# Altium PCB miaow-foc-board.pcbdoc (part 1 of 10)
Units mil, origin at the board's own origin, x right, y up, seen from the top; angles counter-clockwise.
Board outline 2755.91 x 3149.61 mil, 6 copper layers (SIG1, GND2, SIG3, PWR4, GND5, SIG6), stack 60.566 mil thick; 437 components, 392 nets, 2120 pads, 1697 vias.
Unrouted connection lines stored in the file: 1090.
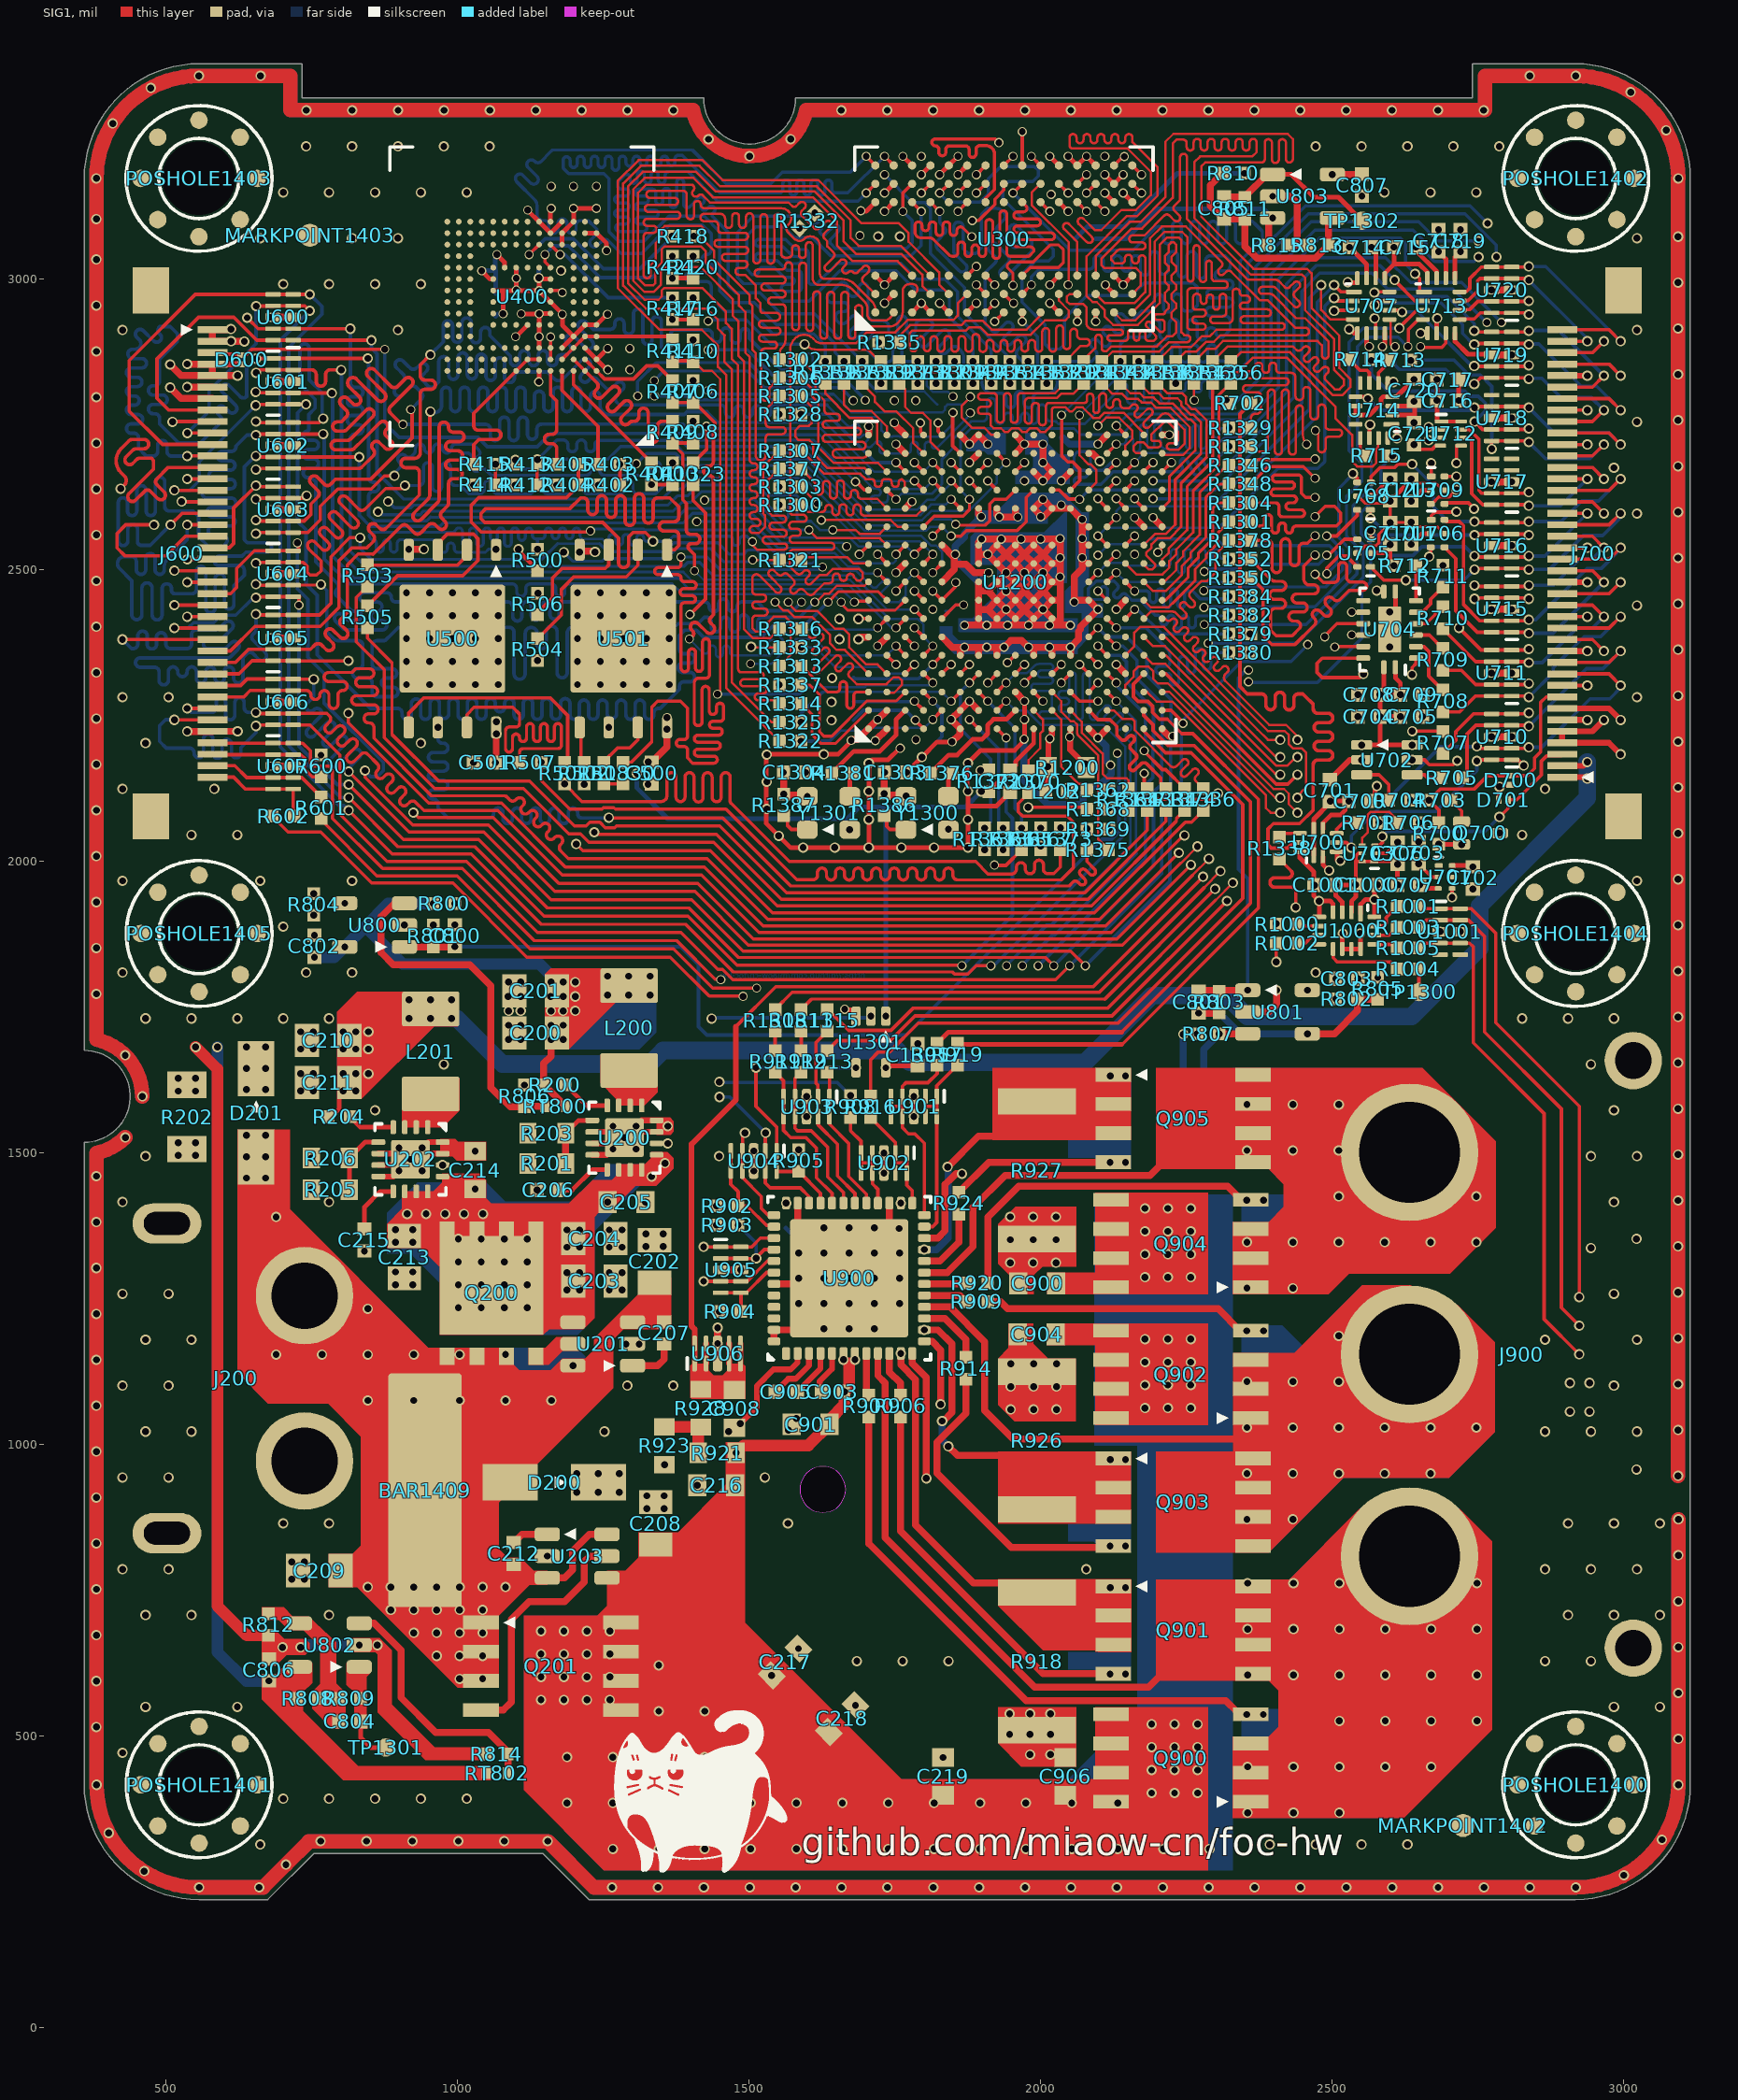
[diagram p0: SIG1 view]
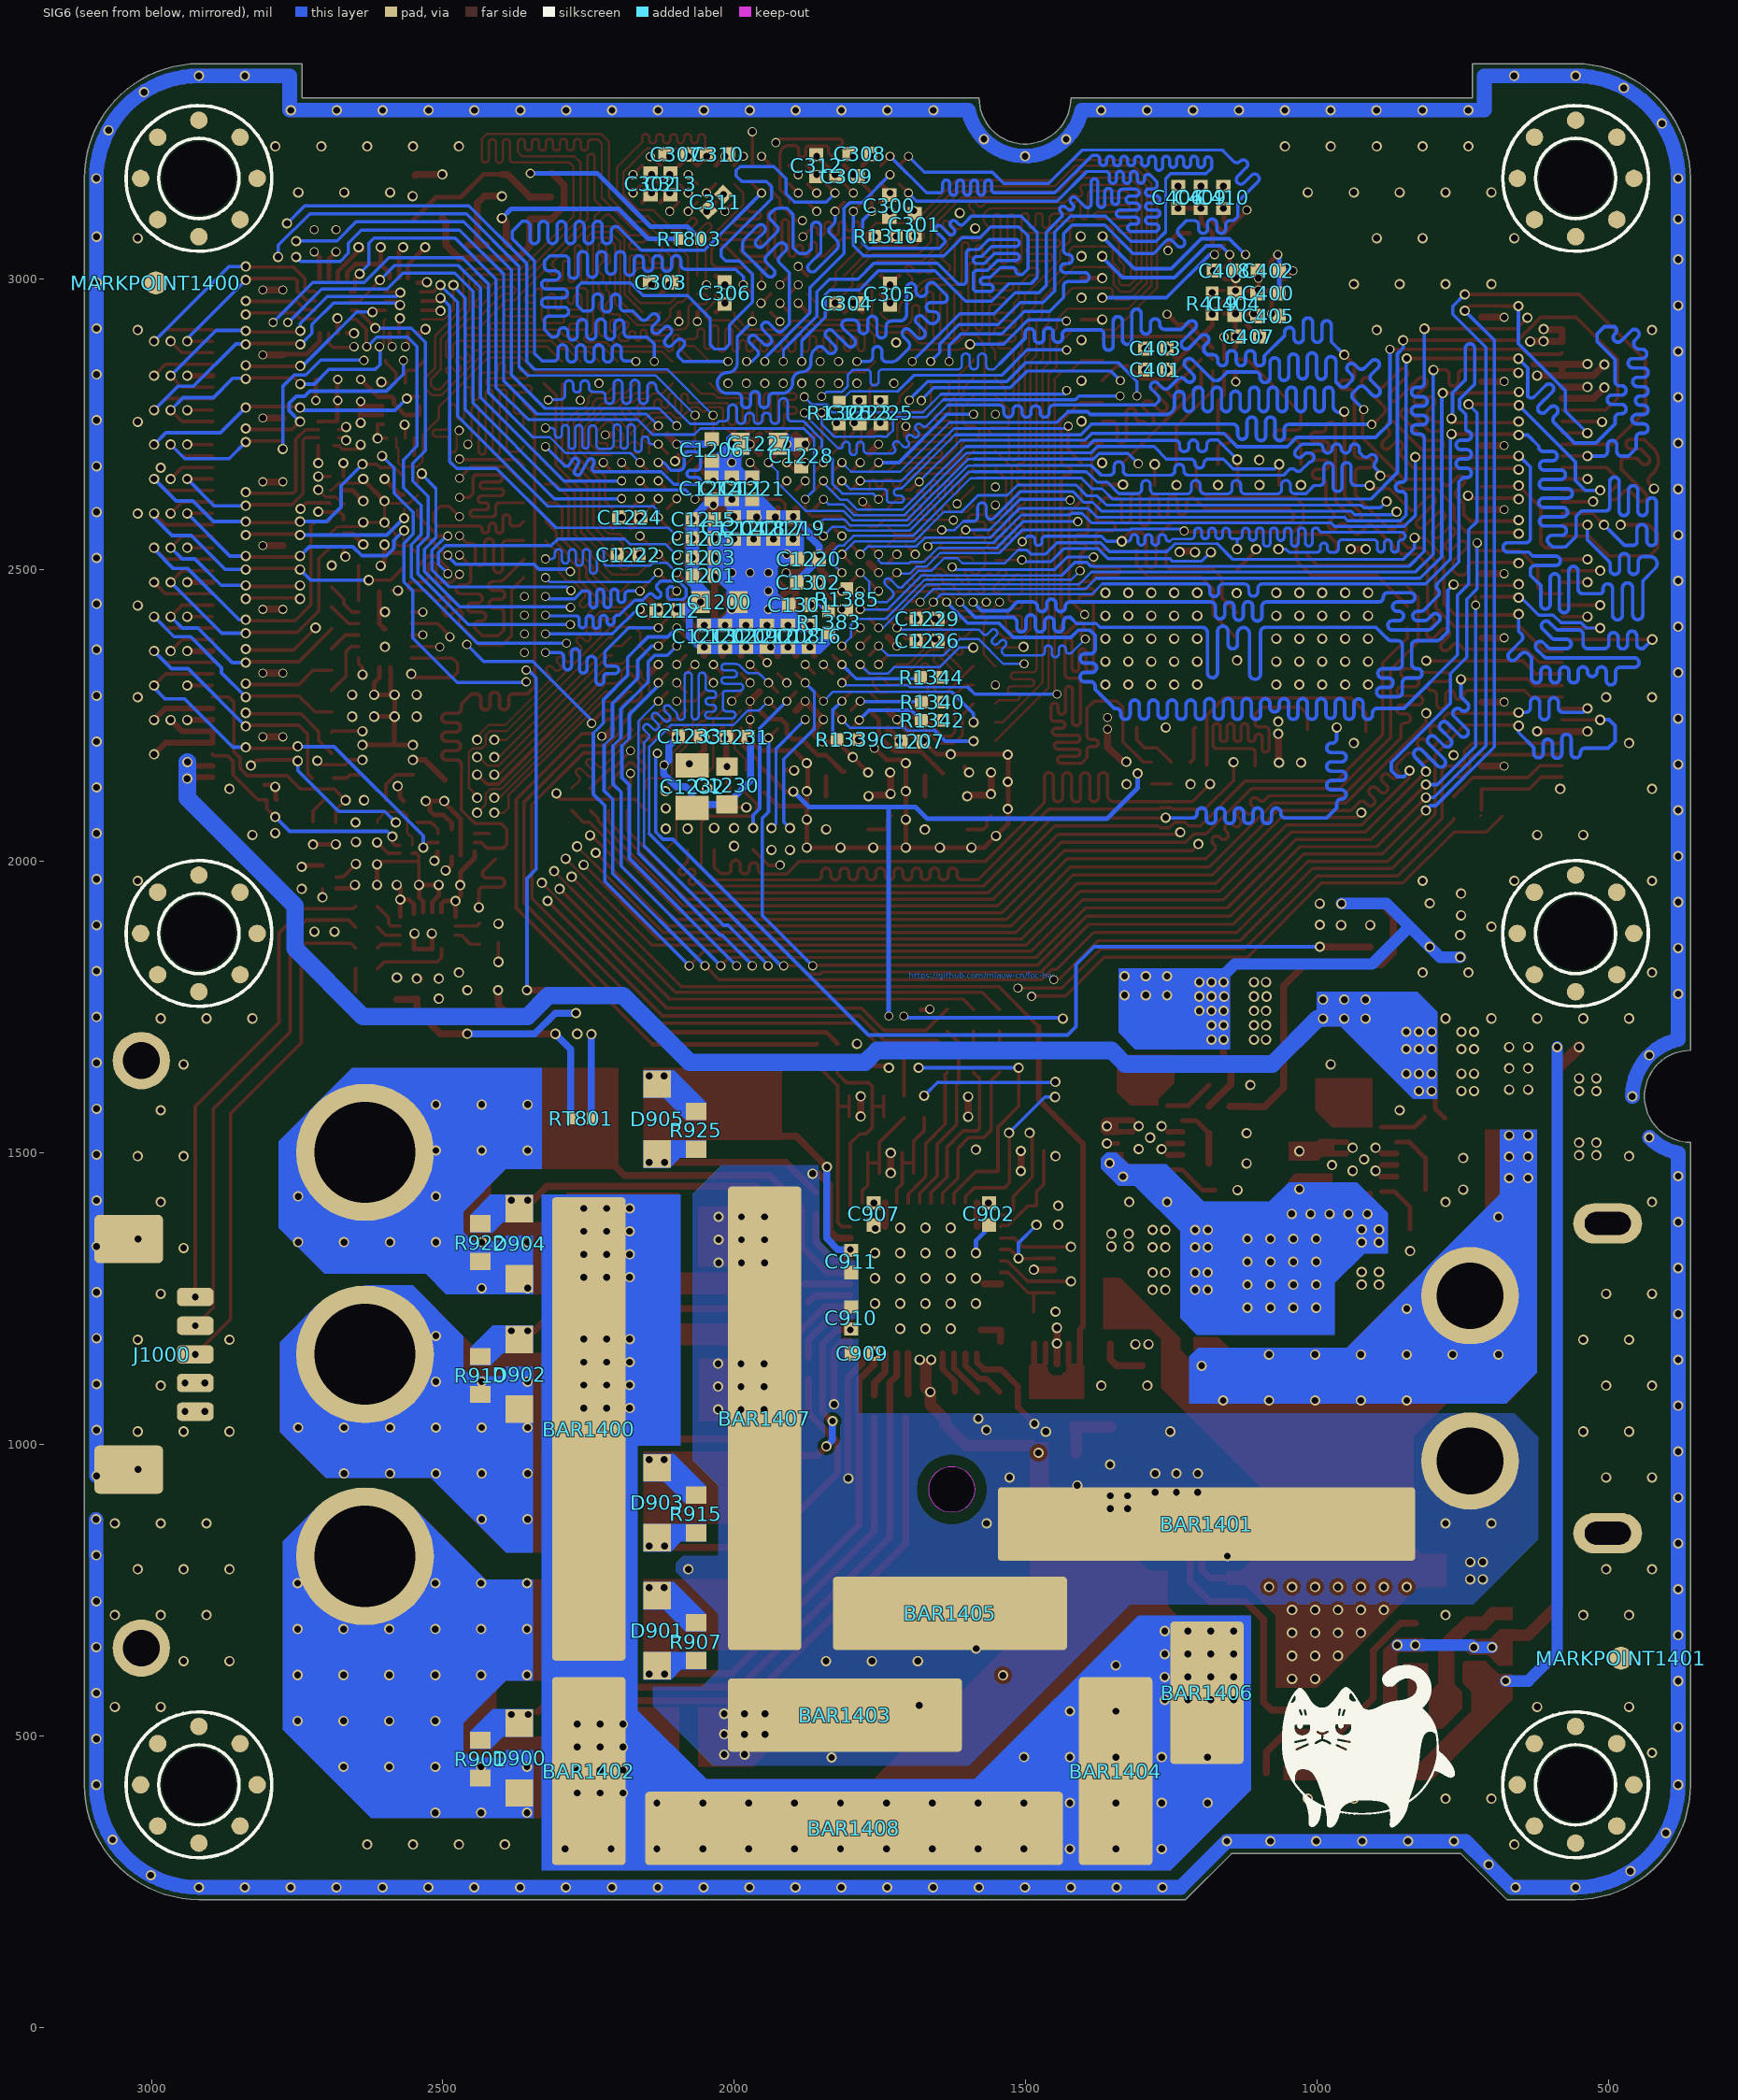
[diagram p1: SIG6 view, seen from below]
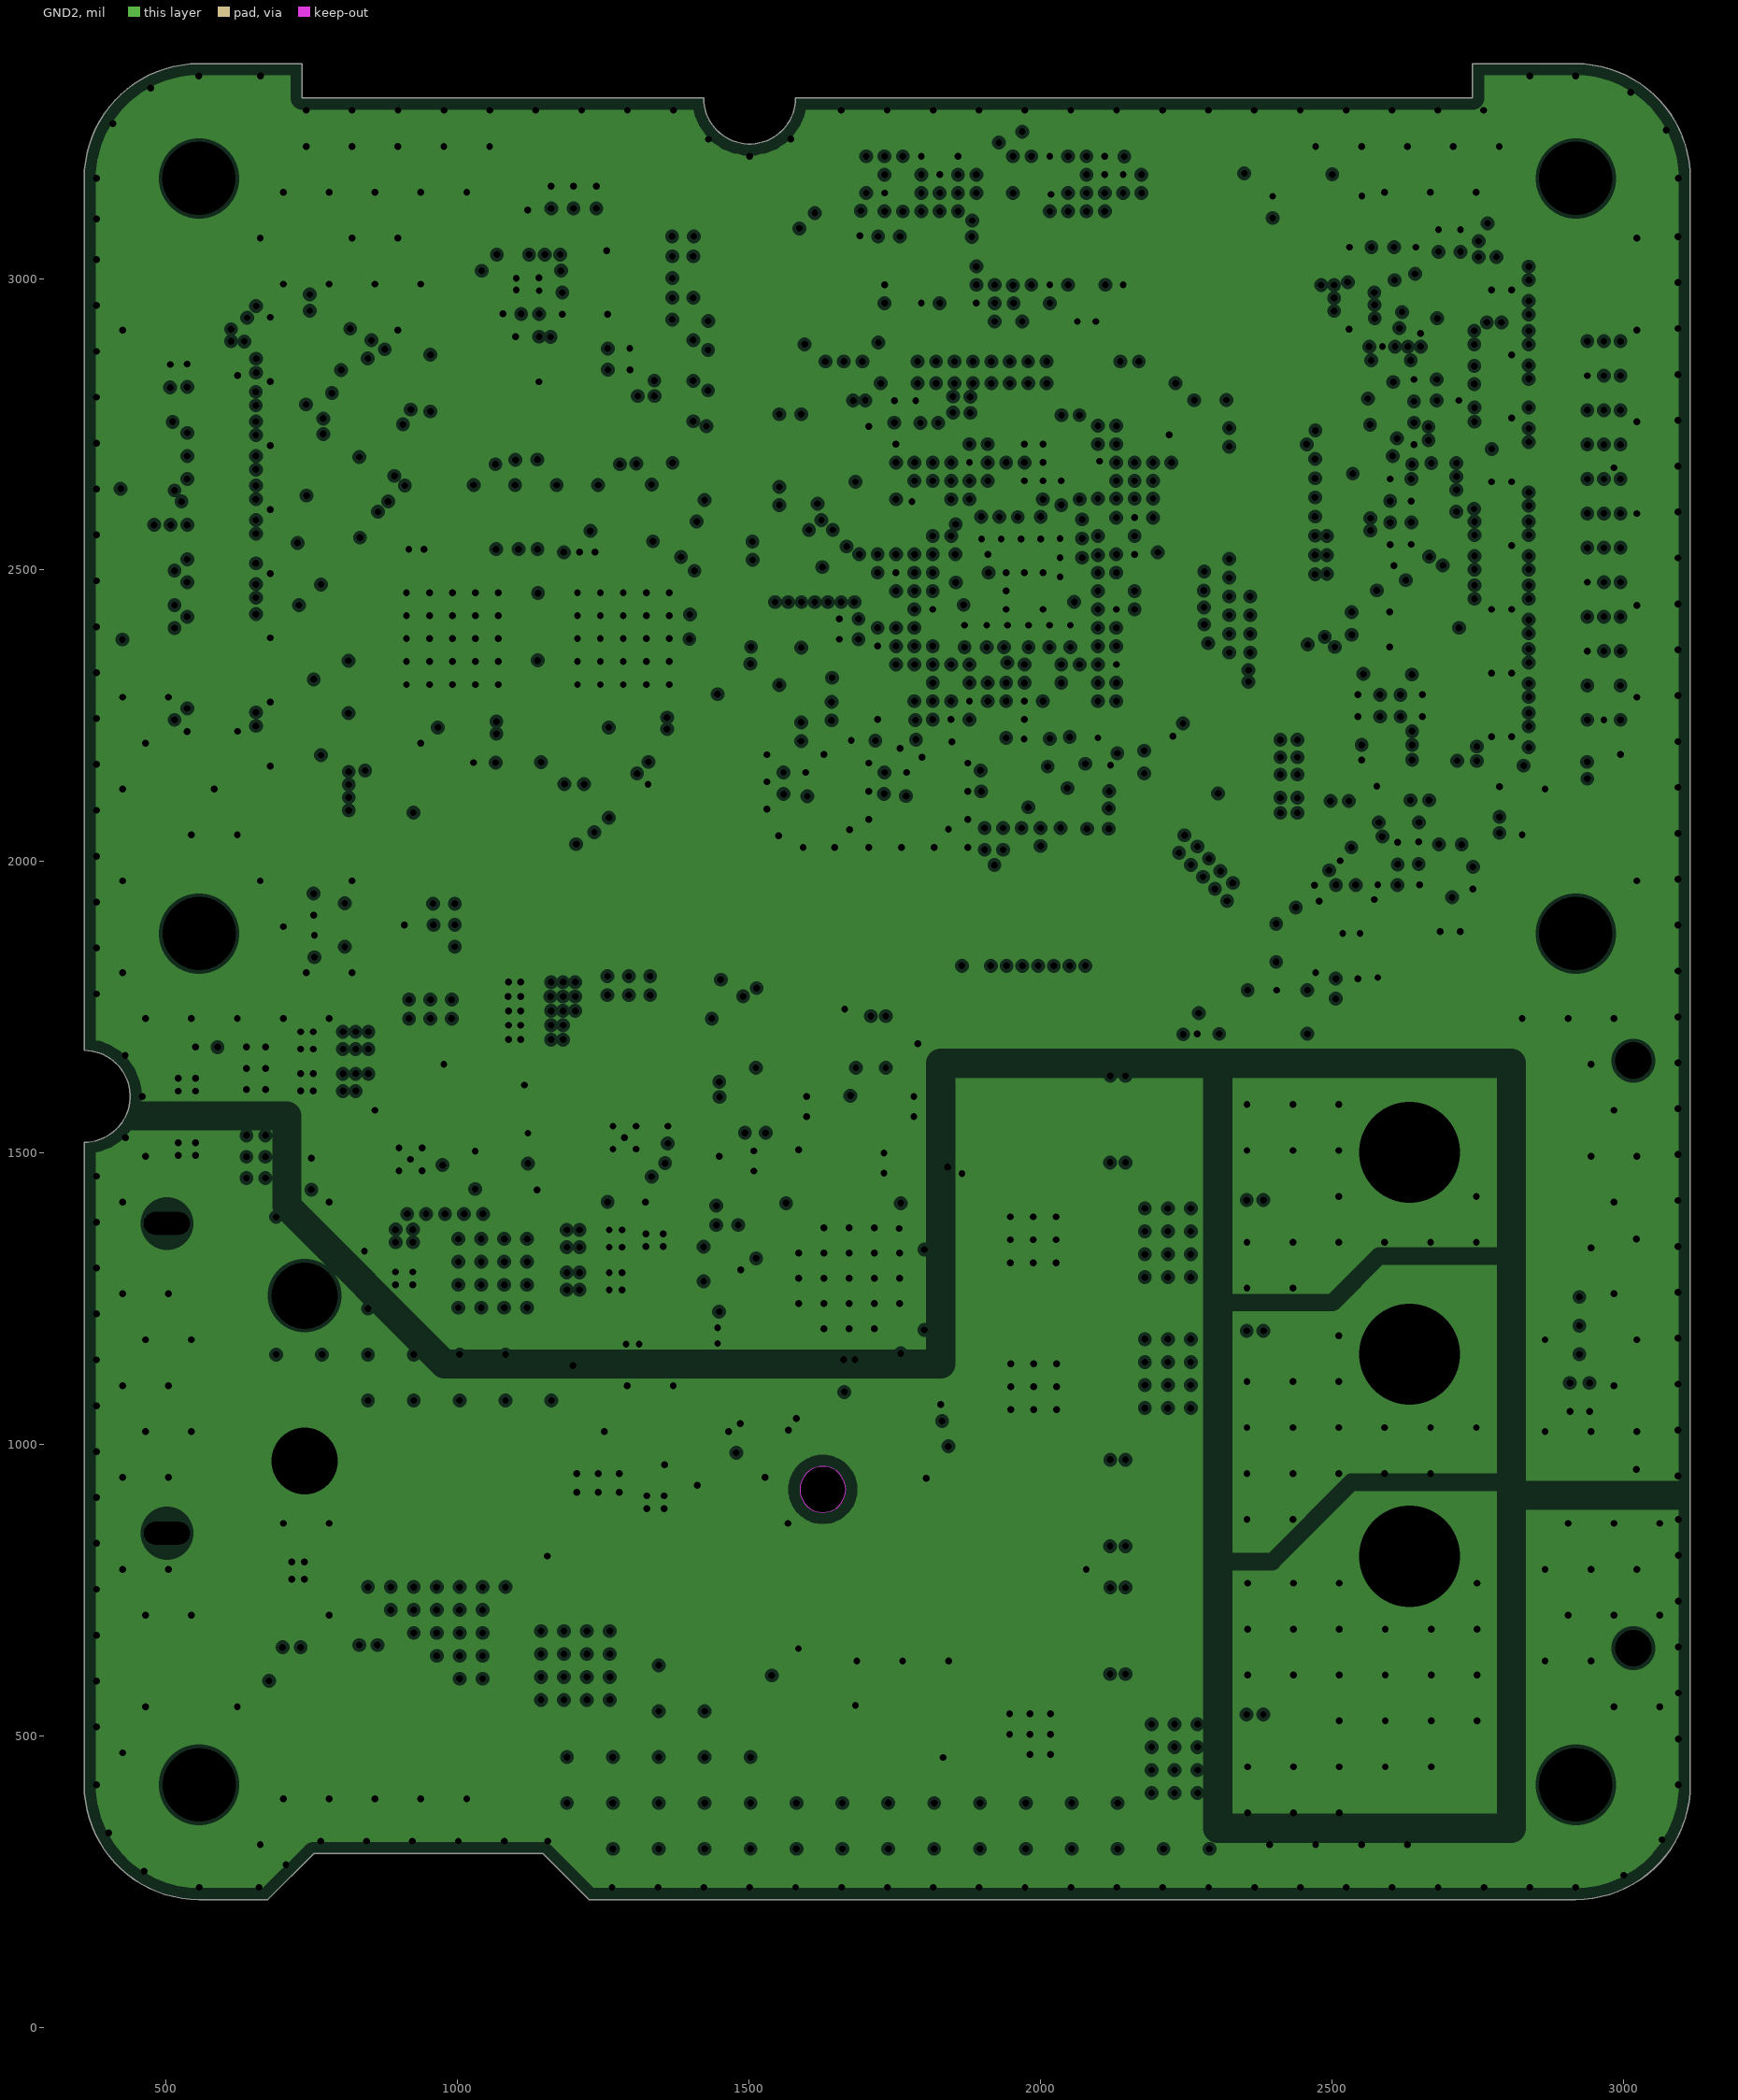
[diagram p2: GND2, clearances drawn from the general rule]
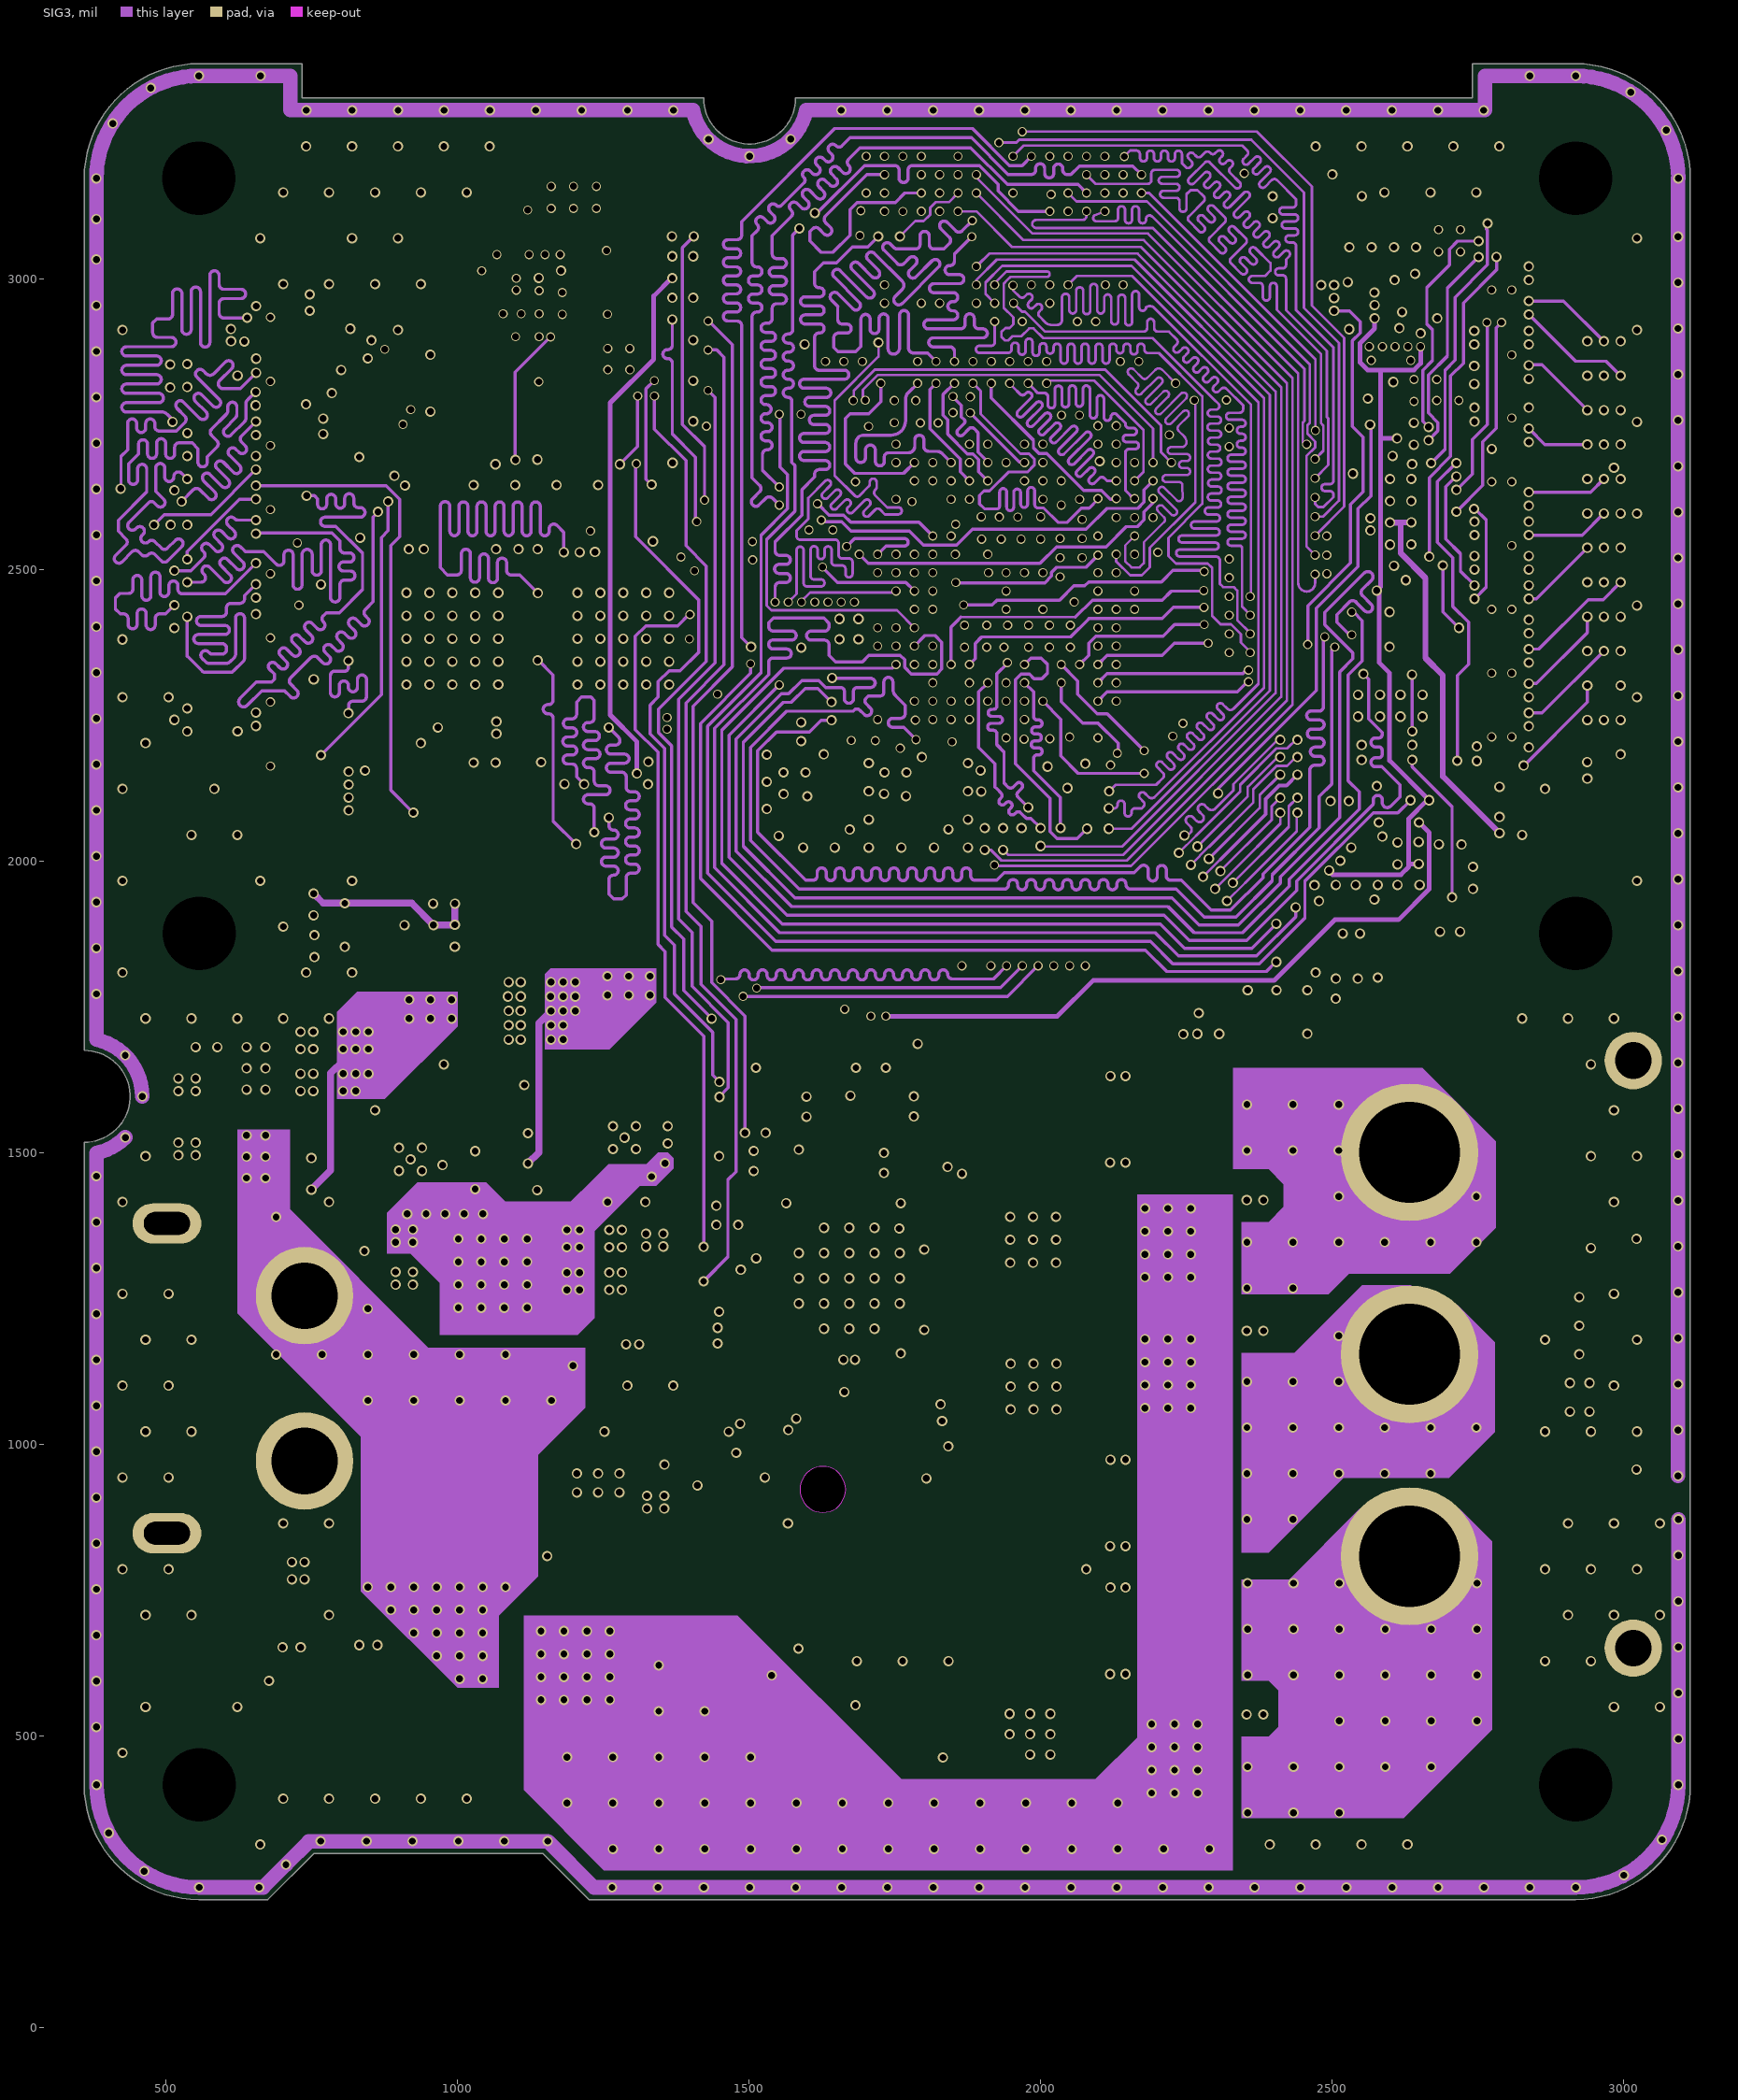
[diagram p3: SIG3]
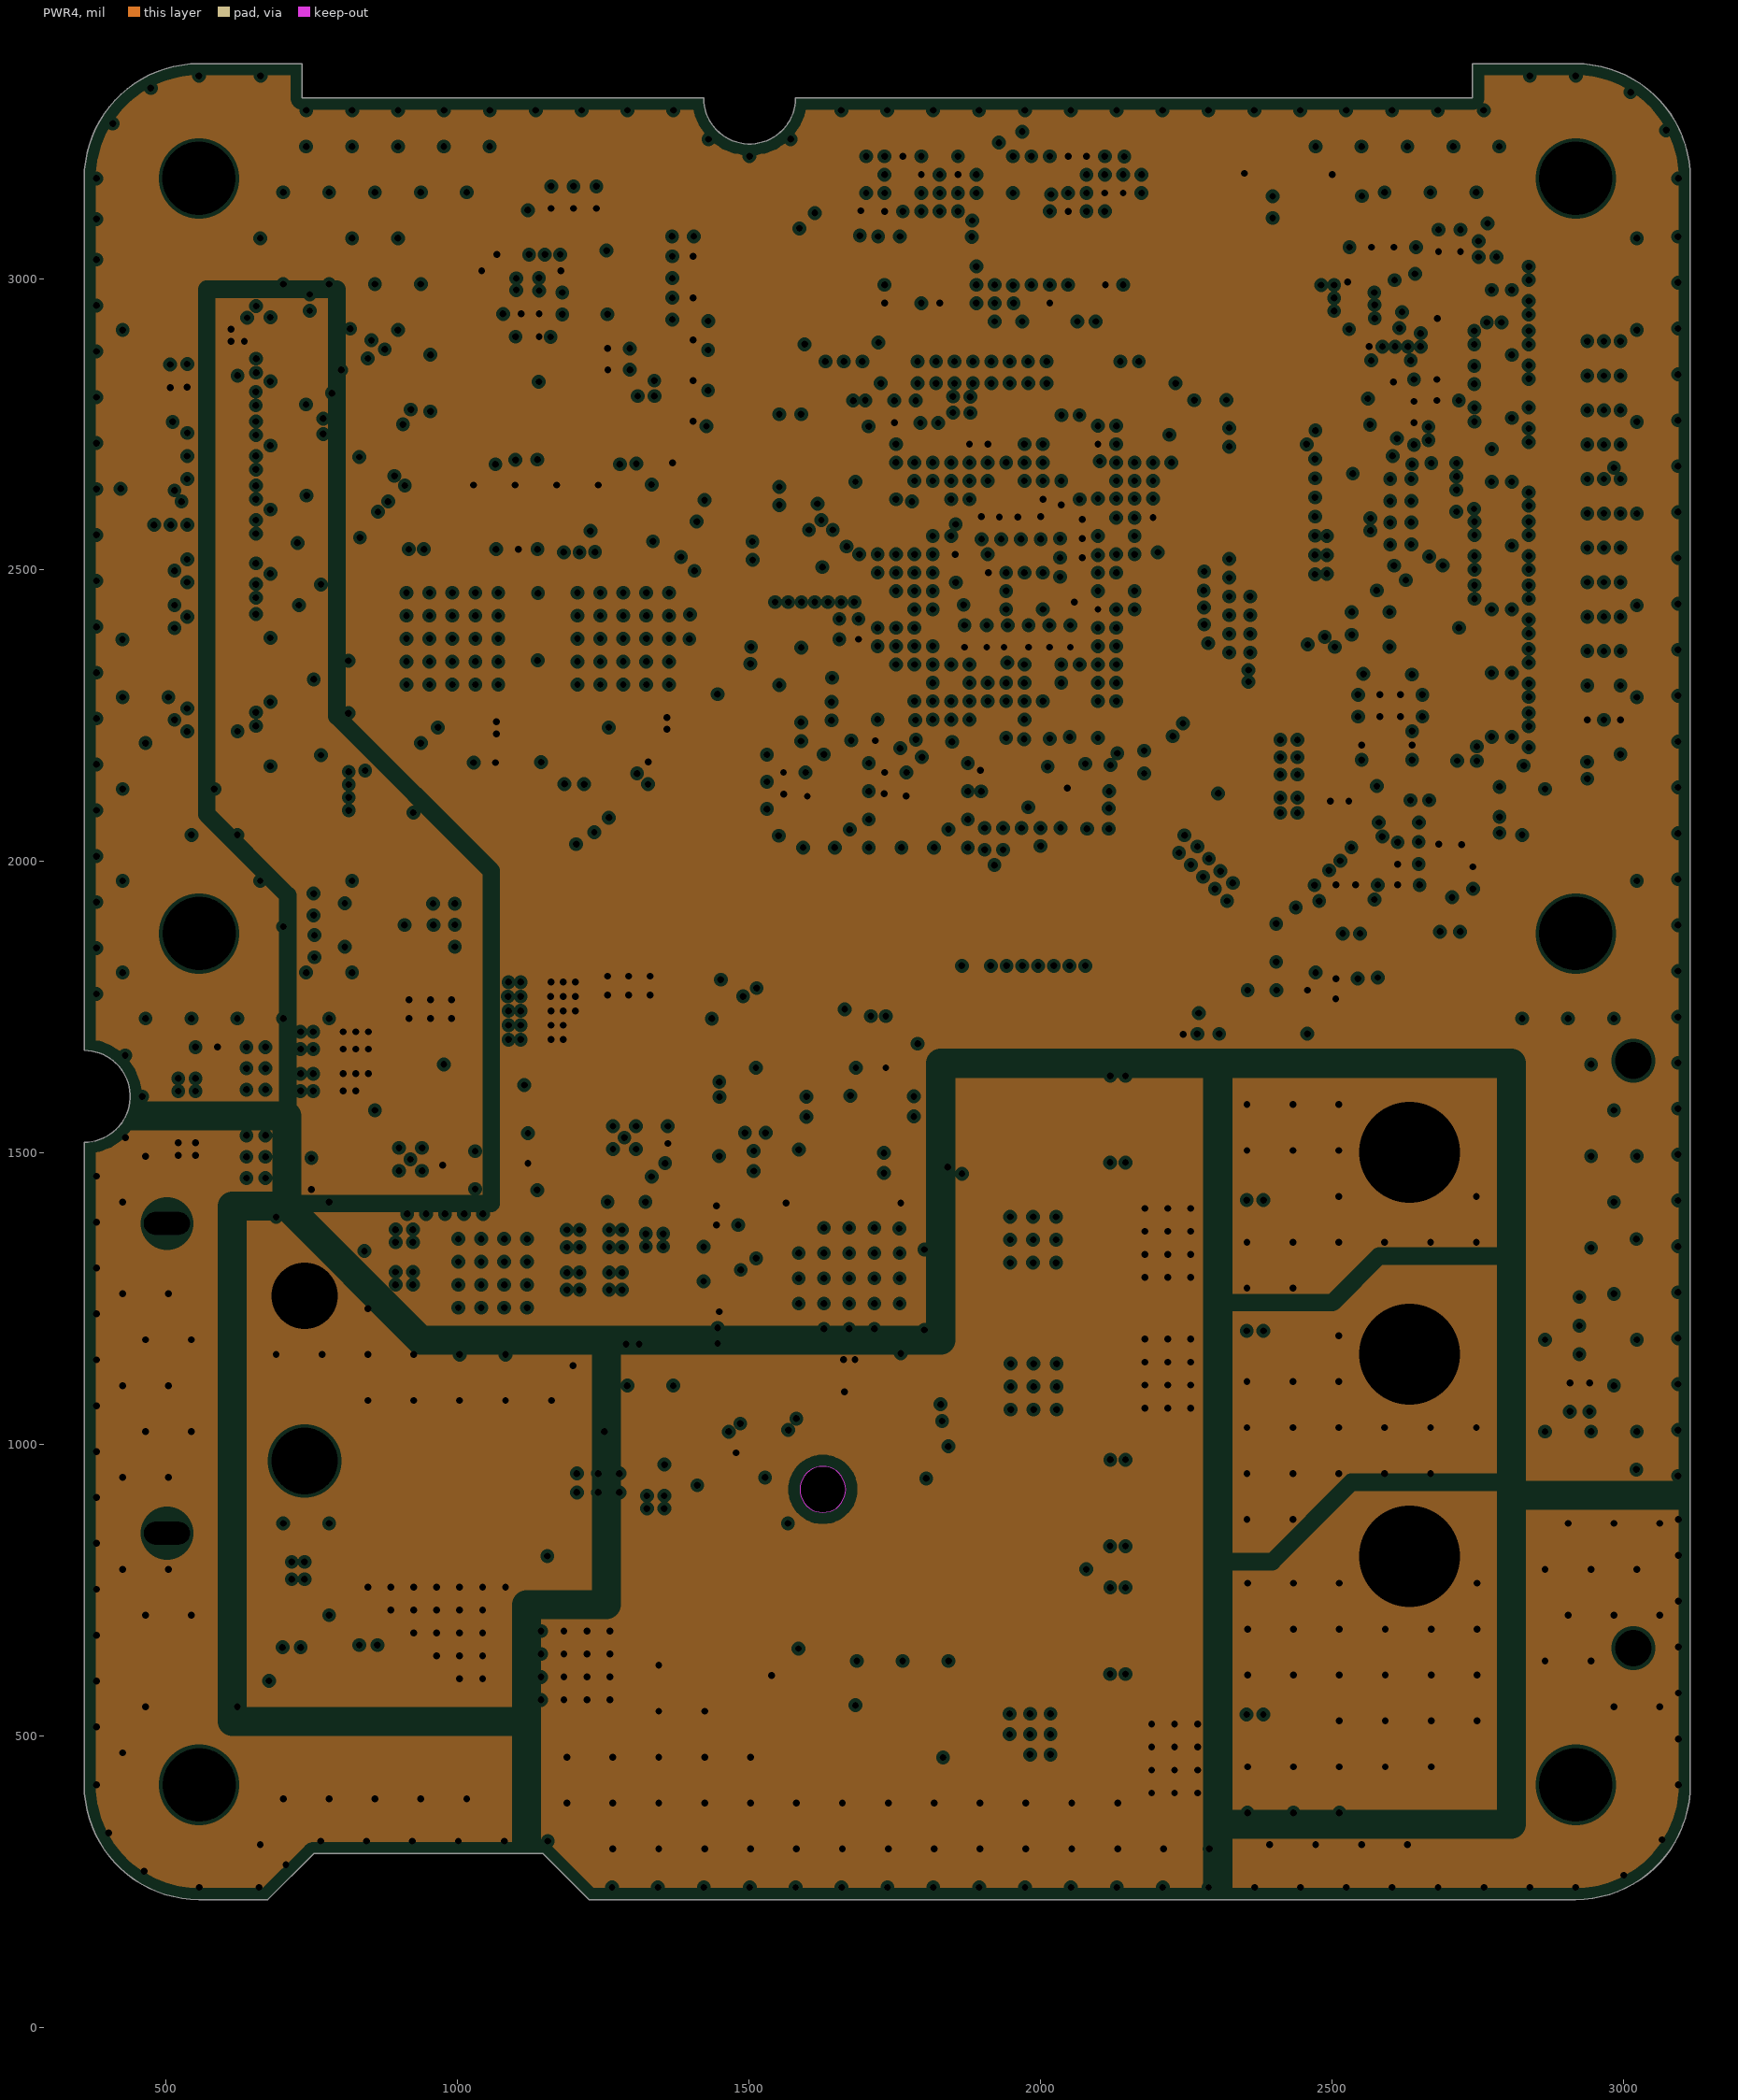
[diagram p4: PWR4, clearances drawn from the general rule]
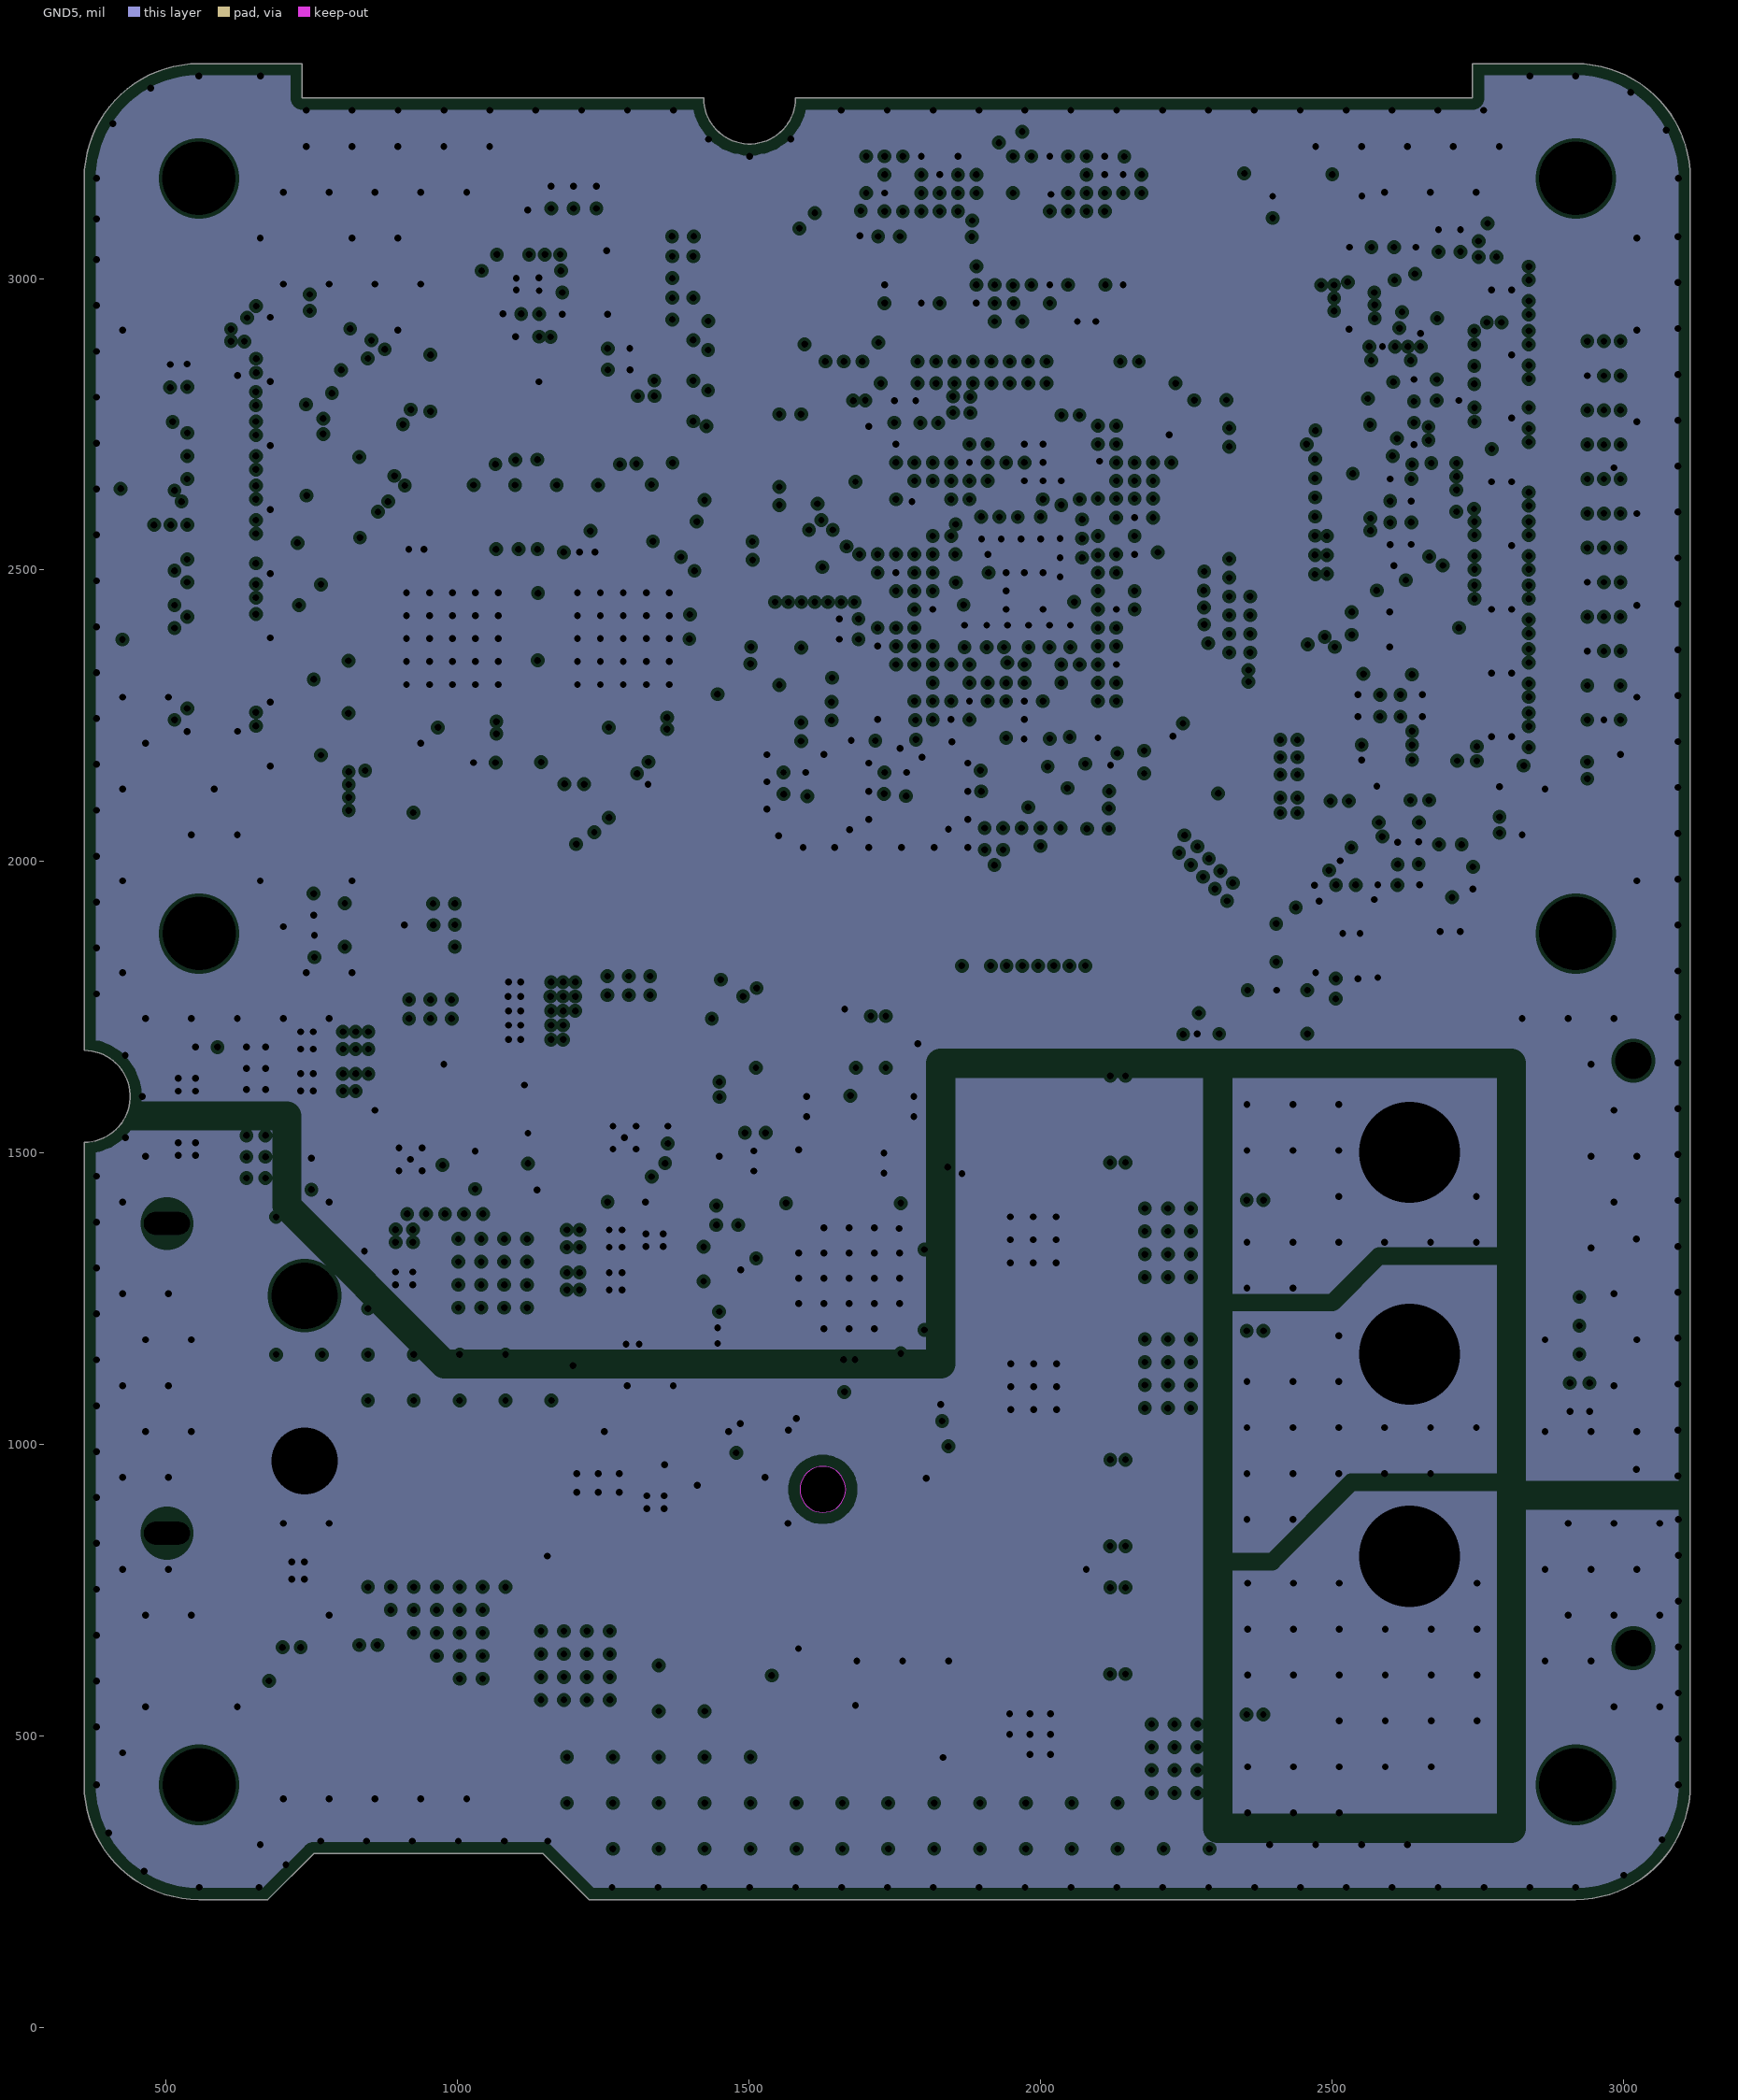
[diagram p5: GND5, clearances drawn from the general rule]
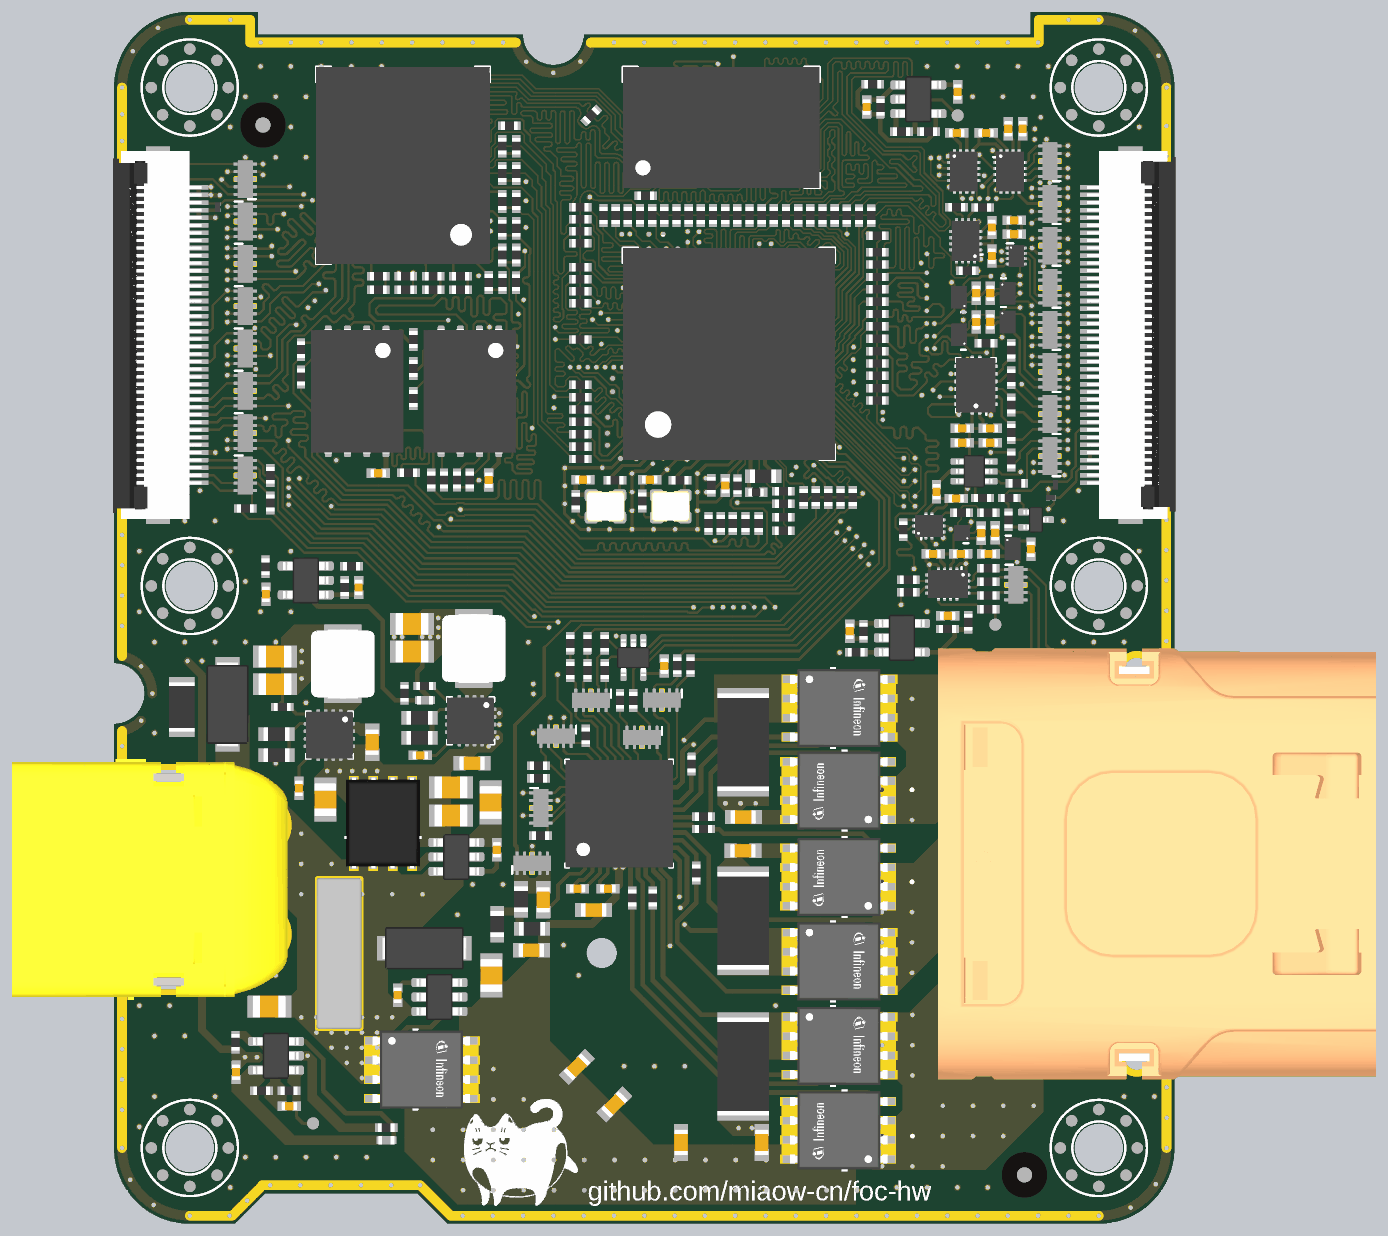
[diagram p14: 3D render of the assembled board from above, using the file's embedded part models]
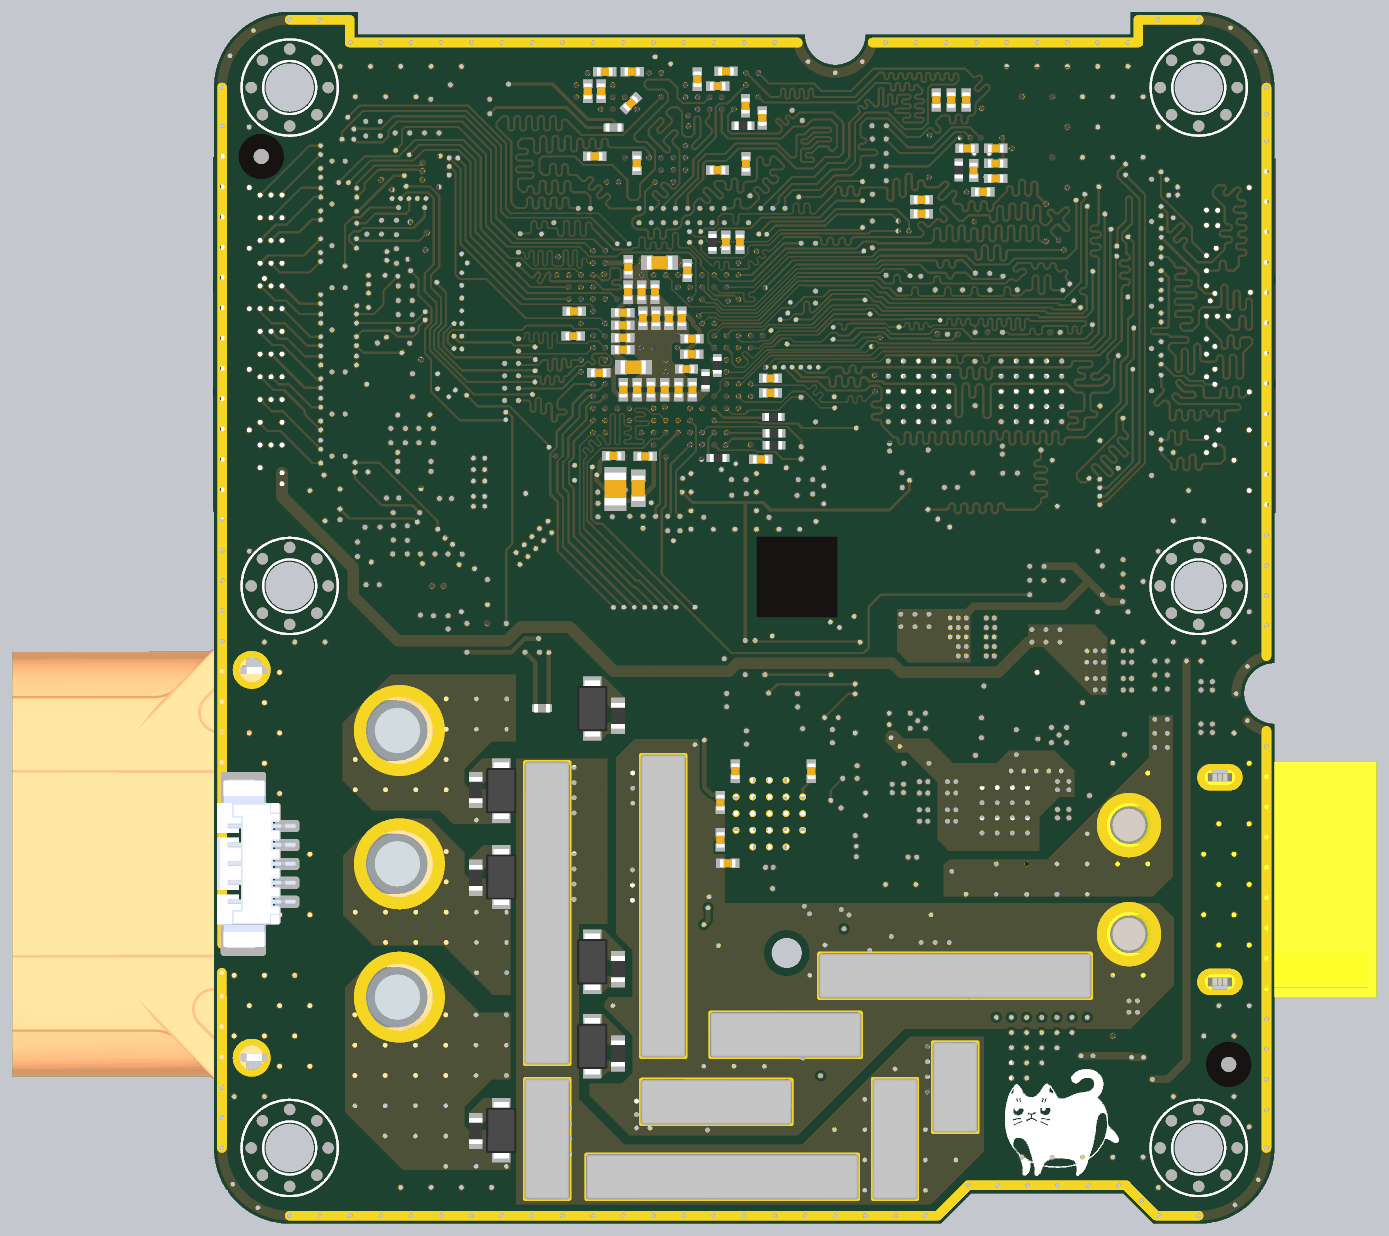
[diagram p15: 3D render of the assembled board from below, using the file's embedded part models]

## Layer stack, top to bottom
Top Solder: solder mask 0.4, Solder Resist, Dk 3.5
SIG1: signal copper 1.378
Dielectric 2: prepreg 3.913, PP-015, Dk 4.3
GND2: plane copper 0.598, net (Multiple Nets)
Dielectric 3: core 21.654, Core-037, Dk 4.8
SIG3: signal copper 0.598
Dielectric 1: prepreg 4.284, PP-016, Dk 4.4
PWR4: plane copper 0.598, net (Multiple Nets)
Dielectric 4: core 21.654, Core-037, Dk 4.8
GND5: plane copper 0.598, net (Multiple Nets)
Dielectric 5: prepreg 3.913, PP-015, Dk 4.3
SIG6: signal copper 1.378
Bottom Solder: solder mask 0.4, Solder Resist, Dk 3.5

## Board outline
359.36,416.03 359.36,1518.39 ccw(c359.36,1597.13) 359.36,1675.87 359.36,3171.94 cw(c556.21,3171.94) 556.21,3368.79 733.37,3368.79 733.37,3309.73 1422.35,3309.73 ccw(c1501.09,3309.73) 1579.83,3309.73 2741.48,3309.73 2741.48,3368.79 2918.41,3368.79 cw(c2918.41,3171.94) 3115.26,3171.94 3115.26,416.03 cw(c2918.41,416.03) 2918.41,219.18 1225.5,219.18 1146.76,297.92 753.06,297.92 674.32,219.18 556.21,219.18 cw(c556.21,416.03)
cut-out: 1587.39,922.77 ccw(c1626.76,922.77) 1626.76,883.4 ccw(c1626.76,922.77) 1666.13,922.77 ccw(c1626.76,922.77) 1626.76,962.14 ccw(c1626.76,922.77)

## Design rules (kind name [scope] priority, off if disabled: settings)
AcuteAngle AcuteAngle_1 [All] p1: isadvanced=TRUE minimum=7.50000000000000E+0001 checktracksonly=TRUE
AssemblyTestPointUsage [All] p1: isadvanced=TRUE
AssemblyTestpoint [All] p1: isadvanced=TRUE testpointundercomponent=TRUE minsize=40 maxsize=100 preferedsize=60 minholesize=0 maxholesize=40 preferedholesize=32 testpointgrid=1 usegrid=TRUE gridtolerance=0.01 allowsidetop=TRUE allowsidebottom=TRUE
BoardOutlineClearance [All] p1: isadvanced=TRUE gap=7.87 ignorepadtopadclearanceinfootprint=FALSE
Clearance "Stitching GDRVA" [IsStitchingVia and InNet('GDRVA') vs (IsVia and (Not IsStitchingVia)) Or IsPad] p1: isadvanced=TRUE gap=5 ignorepadtopadclearanceinfootprint=FALSE
Clearance Clearance_BGA [InComponent('U1200') or InComponent('U300') or InComponent('U400')] p2: isadvanced=TRUE gap=3 ignorepadtopadclearanceinfootprint=TRUE except(3.54: Arc-SMDPad Arc-THPad Track-SMDPad Track-THPad SMDPad-SMDPad SMDPad-THPad SMDPad-Via SMDPad-Fill SMDPad-Region SMDPad-Text SMDPad-Hole THPad-THPad THPad-Via THPad-Fill THPad-Poly THPad-Region THPad-Text THPad-Hole; 6: Arc-Poly Track-Poly SMDPad-Poly Via-Poly Fill-Poly Poly-Poly Poly-Region Poly-Text Poly-Hole)
Clearance [All] p3: isadvanced=TRUE gap=3.94 ignorepadtopadclearanceinfootprint=TRUE except(3.5: Arc-Arc Arc-Track Arc-Via Arc-Fill Arc-Region Arc-Text Track-Track Track-Via Track-Fill Track-Region Track-Text Via-Via Via-Fill Via-Region Via-Text Fill-Fill Fill-Region Fill-Text Region-Region Region-Text Text-Text Hole-Hole; 6: Arc-Poly Track-Poly SMDPad-Poly THPad-Poly Via-Poly Fill-Poly Poly-Poly Poly-Region Poly-Text Poly-Hole)
Clearance Clearance_SameNet [not IsVia vs not IsVia] p4: isadvanced=TRUE gap=0 ignorepadtopadclearanceinfootprint=TRUE except(3: Arc-Arc Arc-Track Arc-Fill Arc-Poly Arc-Region Arc-Text Track-Track Track-Fill Track-Poly Track-Region Track-Text SMDPad-SMDPad SMDPad-Fill SMDPad-Poly SMDPad-Region THPad-Hole Fill-Text Poly-Text Region-Text Text-Text Hole-Hole)
Clearance Clearance_1_1 [(ExistsOnLayer('SIG3')) vs (ExistsOnLayer('SIG3'))] p5: gap=3.5 ignorepadtopadclearanceinfootprint=FALSE except(3.94: Arc-SMDPad Arc-THPad Track-SMDPad Track-THPad SMDPad-SMDPad SMDPad-THPad SMDPad-Via SMDPad-Fill SMDPad-Poly SMDPad-Region SMDPad-Text SMDPad-Hole THPad-THPad THPad-Via THPad-Fill THPad-Poly THPad-Region THPad-Text THPad-Hole) sourcerule=168 cellrowname=All cellrowtype=0 cellcolname=All cellcoltype=0 innerlayers=TRUE
Clearance Clearance_1_2 [(ExistsOnLayer('SIG1') Or ExistsOnLayer('SIG6')) vs (ExistsOnLayer('SIG1') Or ExistsOnLayer('SIG6'))] p6: gap=3.5 ignorepadtopadclearanceinfootprint=FALSE except(3.94: Arc-SMDPad Arc-THPad Track-SMDPad Track-THPad SMDPad-SMDPad SMDPad-THPad SMDPad-Via SMDPad-Fill SMDPad-Poly SMDPad-Region SMDPad-Text SMDPad-Hole THPad-THPad THPad-Via THPad-Fill THPad-Poly THPad-Region THPad-Text THPad-Hole) sourcerule=168 cellrowname=All cellrowtype=0 cellcolname=All cellcoltype=0 outerlayers=TRUE
Clearance Clearance_1 [All] p7: gap=10 ignorepadtopadclearanceinfootprint=FALSE ismatrix=TRUE
ComponentClearance [All] p1: isadvanced=TRUE gap=10 collisioncheckmode=3 verticalgap=10 showdistances=FALSE
FabricationTestPointUsage [All] p1: isadvanced=TRUE valid=0 allowmultiple=FALSE
FabricationTestpoint [All] p1: isadvanced=TRUE side=3 testpointundercomponent=TRUE minsize=40 maxsize=100 preferedsize=60 minholesize=0 maxholesize=40 preferedholesize=32 testpointgrid=1 allowsidetop=TRUE allowsidebottom=TRUE usegrid=TRUE gridtolerance=0.01
FanoutControl Fanout_BGA [IsBGA or HasFootprint('IS42S32800J-6BLI') or HasFootprint('KLMAG2GEND-B031')] p1: isadvanced=TRUE bgadir=Out bgaviamode=Centered fanoutstyle=BGA fanoutdirection=Alternating viagrid=1 // Fanout_BGA (Default Rule)
FanoutControl Fanout_LCC [IsLCC] p2: isadvanced=TRUE bgadir=Out bgaviamode=Centered fanoutstyle=UnderPads fanoutdirection=Alternating viagrid=1 // Fanout_LCC (Default Rule)
FanoutControl Fanout_SOIC [IsSOIC] p3: isadvanced=TRUE bgadir=Out bgaviamode=Centered fanoutstyle=UnderPads fanoutdirection=Alternating viagrid=1 // Fanout_SOIC (Default Rule)
FanoutControl Fanout_Small [(CompPinCount < 5)] p4: isadvanced=TRUE bgadir=Out bgaviamode=Centered fanoutstyle=UnderPads fanoutdirection=OutThenIn viagrid=1 // Fanout_Small (Default Rule)
FanoutControl Fanout_Default [All] p5: isadvanced=TRUE bgadir=Out bgaviamode=Centered fanoutstyle=UnderPads fanoutdirection=Alternating viagrid=1 // Fanout_Default (Default Rule)
Height [All] p1: isadvanced=TRUE minheight=0 maxheight=1000 prefheight=500
HoleSize [All] p1: isadvanced=TRUE absolutevalues=TRUE maxlimit=248.03 minlimit=11.81 maxpercent=80.000 minpercent=20.000
HoleToHoleClearance [All] p1: isadvanced=TRUE gap=7.87 allowstackedmicrovias=TRUE
LayerPairs [All] p1: isadvanced=TRUE enforce=TRUE
Length "Schematic Length Constraint_5" [InxNetClass('XNCLS_SDRAM_CTL')] p1: maxlimit=4724.41 minlimit=0
Length "Schematic Length Constraint_4" [InxNetClass('XNCLS_NOR')] p2: maxlimit=4724.41 minlimit=0
Length "Schematic Length Constraint_3" [InxNetClass('XNCLS_EMMC')] p3: maxlimit=4724.41 minlimit=0
Length "Schematic Length Constraint_2" [InxNetClass('XNCLS_SDRAM_ADR')] p4: maxlimit=4724.41 minlimit=0
Length "Schematic Length Constraint_1" [InxNetClass('XNCLS_SDRAM_DAT')] p5: maxlimit=4724.41 minlimit=0
Length "Schematic Length Constraint" [InxNetClass('XNCLS_SDRAM_CLK')] p6: maxlimit=4724.41 minlimit=0
MatchedLengths "Schematic Matched Net Lengths" [InxSignalClass('XCLS_SDRAM_CTL')] p1: isadvanced=TRUE tolerance=250 checknetsindiffpair=FALSE checkdiffpairvsdiffpair=TRUE checkxsignals=TRUE checkothers=TRUE
MatchedLengths "Schematic Matched Net Lengths_1" [InxSignalClass('XCLS_SDRAM_CLK')] p2: isadvanced=TRUE tolerance=250 checknetsindiffpair=FALSE checkdiffpairvsdiffpair=TRUE checkxsignals=TRUE checkothers=TRUE
MatchedLengths "Schematic Matched Net Lengths_9" [InxSignalClass('XCLS_SDRAM_ADR')] p3: isadvanced=TRUE tolerance=250 checknetsindiffpair=FALSE checkdiffpairvsdiffpair=TRUE checkxsignals=TRUE checkothers=TRUE
MatchedLengths "Schematic Matched Net Lengths_2" [InxSignalClass('XCLS_NOR')] p4: isadvanced=TRUE tolerance=250 checknetsindiffpair=FALSE checkdiffpairvsdiffpair=TRUE checkxsignals=TRUE checkothers=TRUE
MatchedLengths "Schematic Matched Net Lengths_8" [InxSignalClass('XCLS_LCD_DAT')] p5: isadvanced=TRUE tolerance=250 checknetsindiffpair=FALSE checkdiffpairvsdiffpair=TRUE checkxsignals=TRUE checkothers=TRUE
MatchedLengths "Schematic Matched Net Lengths_7" [InxSignalClass('XCLS_ENC_PARTB')] p6: tolerance=250 checknetsindiffpair=FALSE checkdiffpairvsdiffpair=TRUE checkxsignals=TRUE checkothers=TRUE
MatchedLengths "Schematic Matched Net Lengths_12" [InxSignalClass('XCLS_LCD_CTL')] p7: isadvanced=TRUE tolerance=250 checknetsindiffpair=FALSE checkdiffpairvsdiffpair=TRUE checkxsignals=TRUE checkothers=TRUE
MatchedLengths "Schematic Matched Net Lengths_3" [InxSignalClass('XCLS_EMMC')] p8: isadvanced=TRUE tolerance=250 checknetsindiffpair=FALSE checkdiffpairvsdiffpair=TRUE checkxsignals=TRUE checkothers=TRUE
MatchedLengths "Schematic Matched Net Lengths_10" [InxSignalClass('XCLS_ENC_PARTA')] p9: tolerance=250 checknetsindiffpair=FALSE checkdiffpairvsdiffpair=TRUE checkxsignals=TRUE checkothers=TRUE
MatchedLengths "Schematic Matched Net Lengths_6" [InxSignalClass('XCLS_DRV_SPI')] p10: tolerance=250 checknetsindiffpair=FALSE checkdiffpairvsdiffpair=TRUE checkxsignals=TRUE checkothers=TRUE
MatchedLengths "Schematic Matched Net Lengths_5" [InxSignalClass('XCLS_DRV_PWM')] p11: isadvanced=TRUE tolerance=250 checknetsindiffpair=FALSE checkdiffpairvsdiffpair=TRUE checkxsignals=TRUE checkothers=TRUE
MatchedLengths "Schematic Matched Net Lengths_4" [InxSignalClass('XCLS_DRV_PWM')] p12: tolerance=250 checknetsindiffpair=FALSE checkdiffpairvsdiffpair=TRUE checkxsignals=TRUE checkothers=TRUE
MatchedLengths "Schematic Matched Net Lengths_11" [InxSignalClass('XCLS_DBG_TRACE')] p13: isadvanced=TRUE tolerance=250 checknetsindiffpair=FALSE checkdiffpairvsdiffpair=TRUE checkxsignals=TRUE checkothers=TRUE
MatchedLengths "Schematic Matched Net Lengths_14" [InxSignalClass('XCLS_SDRAM_DAT')] p14: tolerance=250 checknetsindiffpair=FALSE checkdiffpairvsdiffpair=TRUE checkxsignals=TRUE checkothers=TRUE
MaxMinImpedance "Schematic Impedance Constraint_7" [InxNetClass('XNCLS_SDRAM_CTL')] p1: minimum=45.00 maximum=55.00
MaxMinImpedance "Schematic Impedance Constraint_2" [InxNetClass('XNCLS_NOR')] p2: minimum=45.00 maximum=55.00
MaxMinImpedance "Schematic Impedance Constraint_6" [InxNetClass('XNCLS_EMMC')] p3: minimum=45.00 maximum=55.00
MaxMinImpedance "Schematic Impedance Constraint_5" [InxNetClass('XNCLS_SDRAM_ADR')] p4: minimum=45.00 maximum=55.00
MaxMinImpedance "Schematic Impedance Constraint" [InxNetClass('XNCLS_SDRAM_DAT')] p5: minimum=45.00 maximum=55.00
MaxMinImpedance "Schematic Impedance Constraint_3" [InxNetClass('XNCLS_SDRAM_CLK')] p6: minimum=45.00 maximum=55.00
MaxMinImpedance "Schematic Impedance Constraint_4" [InxNetClass('XNCLS_DBG_BUS')] p7: minimum=45.00 maximum=55.00
MaxMinImpedance "Schematic Impedance Constraint_1" [InxNetClass('XNCLS_DBG_TRACE')] p8: minimum=45.00 maximum=55.00
MinimumAnnularRing MinimumAnnularRing_1 [All] p1: isadvanced=TRUE minimumring=1.97
MinimumSolderMaskSliver [All] p1: isadvanced=TRUE minsoldermaskwidth=3.94
NetAntennae [All] p1: isadvanced=TRUE netantennaetolerance=0
PasteMaskExpansion [All] p1: isadvanced=TRUE expansion=0
PlaneClearance [All] p1: isadvanced=TRUE clearance=6
PlaneConnect [All] p1: isadvanced=TRUE planeconnectstyle=Direct reliefexpansion=20 reliefentries=4 reliefconductorwidth=10 reliefairgap=10
PolygonConnect PolygonConnectStyle [All] p1: isadvanced=TRUE connectstyle=Direct reliefconductorwidth=10 reliefentries=2 polygonreliefangle="0 Angle" airgapwidth=10
PolygonConnect [All] p2: connectstyle=Direct reliefconductorwidth=10 reliefentries=4 polygonreliefangle="90 Angle" airgapwidth=10
ReturnPath ReturnPath_1 [All] p1: isadvanced=TRUE impedanceprofileid={CC4B03BC-9ADC-4077-968D-71CF68E7212D} _gaplimit=0
RoutingCorners [All] p1: isadvanced=TRUE cornerstyle=45-Degree minsetback=100 maxsetback=100
RoutingPriority [All] p1: isadvanced=TRUE routingpriority=0
RoutingTopology RoutingTopology_137 [InNet('D22')] p1: topology=Shortest
RoutingTopology RoutingTopology_139 [InNet('D14')] p2: topology=Shortest
RoutingTopology RoutingTopology_1 [InNet('NetR1326_1')] p3: topology=Shortest
RoutingTopology RoutingTopology_2 [InNet('NetR1323_1')] p4: topology=Shortest
RoutingTopology RoutingTopology_3 [InNet('NetR1319_1')] p5: topology=Shortest
RoutingTopology RoutingTopology_4 [InNet('NetR1315_1')] p6: topology=Shortest
RoutingTopology RoutingTopology_5 [InNet('NetR1311_1')] p7: topology=Shortest
RoutingTopology RoutingTopology_6 [InNet('NetR1308_1')] p8: topology=Shortest
RoutingTopology RoutingTopology_7 [InNet('NetR1005_1')] p9: topology=Shortest
RoutingTopology RoutingTopology_8 [InNet('NetR1003_1')] p10: topology=Shortest
RoutingTopology RoutingTopology_9 [InNet('NetR1001_1')] p11: topology=Shortest
RoutingTopology RoutingTopology_10 [InNet('LCD_VSYNC')] p12: topology=Shortest
RoutingTopology RoutingTopology_11 [InNet('LCD_SDA')] p13: topology=Shortest
RoutingTopology RoutingTopology_12 [InNet('LCD_SCL')] p14: topology=Shortest
RoutingTopology RoutingTopology_13 [InNet('LCD_RST')] p15: topology=Shortest
RoutingTopology RoutingTopology_14 [InNet('LCD_R7')] p16: topology=Shortest
RoutingTopology RoutingTopology_15 [InNet('LCD_R6')] p17: topology=Shortest
RoutingTopology RoutingTopology_16 [InNet('LCD_R5')] p18: topology=Shortest
RoutingTopology RoutingTopology_17 [InNet('LCD_R4')] p19: topology=Shortest
RoutingTopology RoutingTopology_18 [InNet('LCD_R3')] p20: topology=Shortest
RoutingTopology RoutingTopology_19 [InNet('LCD_R2')] p21: topology=Shortest
RoutingTopology RoutingTopology_20 [InNet('LCD_R1')] p22: topology=Shortest
RoutingTopology RoutingTopology_21 [InNet('LCD_R0')] p23: topology=Shortest
RoutingTopology RoutingTopology_22 [InNet('LCD_INT')] p24: topology=Shortest
RoutingTopology RoutingTopology_23 [InNet('HSYNC')] p25: topology=Shortest
RoutingTopology RoutingTopology_24 [InNet('G7')] p26: topology=Shortest
RoutingTopology RoutingTopology_25 [InNet('G6')] p27: topology=Shortest
RoutingTopology RoutingTopology_26 [InNet('G5')] p28: topology=Shortest
RoutingTopology RoutingTopology_27 [InNet('G4')] p29: topology=Shortest
RoutingTopology RoutingTopology_28 [InNet('G3')] p30: topology=Shortest
RoutingTopology RoutingTopology_29 [InNet('G2')] p31: topology=Shortest
RoutingTopology RoutingTopology_30 [InNet('G1')] p32: topology=Shortest
RoutingTopology RoutingTopology_31 [InNet('G0')] p33: topology=Shortest
RoutingTopology RoutingTopology_32 [InNet('ENC_B')] p34: topology=Shortest
RoutingTopology RoutingTopology_33 [InNet('ENC_A')] p35: topology=Shortest
RoutingTopology RoutingTopology_34 [InNet('DRV_SDO')] p36: topology=Shortest
RoutingTopology RoutingTopology_35 [InNet('DE')] p37: topology=Shortest
RoutingTopology RoutingTopology_36 [InNet('CLK')] p38: topology=Shortest
RoutingTopology RoutingTopology_37 [InNet('B7')] p39: topology=Shortest
RoutingTopology RoutingTopology_38 [InNet('B6')] p40: topology=Shortest
RoutingTopology RoutingTopology_39 [InNet('B5')] p41: topology=Shortest
RoutingTopology RoutingTopology_40 [InNet('B4')] p42: topology=Shortest
RoutingTopology RoutingTopology_41 [InNet('B3')] p43: topology=Shortest
RoutingTopology RoutingTopology_42 [InNet('B2')] p44: topology=Shortest
RoutingTopology RoutingTopology_43 [InNet('B1')] p45: topology=Shortest
RoutingTopology RoutingTopology_44 [InNet('B0')] p46: topology=Shortest
RoutingTopology RoutingTopology_45 [InxNet('ENC_B')] p47: topology=Shortest
RoutingTopology RoutingTopology_46 [InxNet('ENC_A')] p48: topology=Shortest
RoutingTopology RoutingTopology_47 [InxNet('LCD_VSYNC')] p49: topology=Shortest
RoutingTopology RoutingTopology_48 [InxNet('LCD_SDA')] p50: topology=Shortest
RoutingTopology RoutingTopology_49 [InxNet('LCD_SCL')] p51: topology=Shortest
RoutingTopology RoutingTopology_50 [InxNet('LCD_RST')] p52: topology=Shortest
RoutingTopology RoutingTopology_51 [InxNet('LCD_R7')] p53: topology=Shortest
RoutingTopology RoutingTopology_52 [InxNet('LCD_R6')] p54: topology=Shortest
RoutingTopology RoutingTopology_53 [InxNet('LCD_R5')] p55: topology=Shortest
RoutingTopology RoutingTopology_54 [InxNet('LCD_R4')] p56: topology=Shortest
RoutingTopology RoutingTopology_55 [InxNet('LCD_R3')] p57: topology=Shortest
RoutingTopology RoutingTopology_56 [InxNet('LCD_R2')] p58: topology=Shortest
RoutingTopology RoutingTopology_57 [InxNet('LCD_R1')] p59: topology=Shortest
RoutingTopology RoutingTopology_58 [InxNet('LCD_R0')] p60: topology=Shortest
RoutingTopology RoutingTopology_59 [InxNet('LCD_INT')] p61: topology=Shortest
RoutingTopology RoutingTopology_60 [InxNet('HSYNC')] p62: topology=Shortest
RoutingTopology RoutingTopology_61 [InxNet('G7')] p63: topology=Shortest
RoutingTopology RoutingTopology_62 [InxNet('G6')] p64: topology=Shortest
RoutingTopology RoutingTopology_63 [InxNet('G5')] p65: topology=Shortest
RoutingTopology RoutingTopology_64 [InxNet('G4')] p66: topology=Shortest
RoutingTopology RoutingTopology_65 [InxNet('G3')] p67: topology=Shortest
RoutingTopology RoutingTopology_66 [InxNet('G2')] p68: topology=Shortest
RoutingTopology RoutingTopology_67 [InxNet('G1')] p69: topology=Shortest
RoutingTopology RoutingTopology_68 [InxNet('G0')] p70: topology=Shortest
RoutingTopology RoutingTopology_69 [InxNet('DE')] p71: topology=Shortest
RoutingTopology RoutingTopology_70 [InxNet('CLK')] p72: topology=Shortest
RoutingTopology RoutingTopology_71 [InxNet('B7')] p73: topology=Shortest
RoutingTopology RoutingTopology_72 [InxNet('B6')] p74: topology=Shortest
RoutingTopology RoutingTopology_73 [InxNet('B5')] p75: topology=Shortest
RoutingTopology RoutingTopology_74 [InxNet('B4')] p76: topology=Shortest
RoutingTopology RoutingTopology_75 [InxNet('B3')] p77: topology=Shortest
RoutingTopology RoutingTopology_76 [InxNet('B2')] p78: topology=Shortest
RoutingTopology RoutingTopology_77 [InxNet('B1')] p79: topology=Shortest
RoutingTopology RoutingTopology_78 [InxNet('B0')] p80: topology=Shortest
RoutingTopology [All] p81: topology=Shortest
RoutingVias RoutingViaStyle [All] p1: isadvanced=TRUE holewidth=11.81 width=17.72 viastyle="Through Hole" minholewidth=11.81 minwidth=15.75 maxholewidth=11.81 maxwidth=17.72
RoutingVias [All] p2: holewidth=11.81 width=17.72 viastyle="Through Hole" minholewidth=11.81 minwidth=17.72 maxholewidth=11.81 maxwidth=17.72
ShortCircuit [All] p1: isadvanced=TRUE allowed=FALSE
SilkToSilkClearance [All] p1 off: isadvanced=TRUE silktosilkclearance=10
SilkToSolderMaskClearance [IsPad] p1: isadvanced=TRUE minsilkscreentomaskgap=0 clearancetoexposedcopper=TRUE
SolderMaskExpansion SolderMaskExpansion_Via [IsVia] p1: isadvanced=TRUE expansion=4 istentingtop=TRUE useseparateexpansions=TRUE expansionbottom=4 istentingbottom=TRUE
SolderMaskExpansion [All] p2: isadvanced=TRUE expansion=0 istentingtop=FALSE
SupplyNets "Schematic Supply Nets_7" [InNet('VIN')] p1: isadvanced=TRUE voltage=12.00
SupplyNets "Schematic Supply Nets_6" [InNet('GDRVA')] p2: isadvanced=TRUE voltage=0.000
SupplyNets "Schematic Supply Nets_5" [InNet('+3V3')] p3: isadvanced=TRUE voltage=0.000
SupplyNets "Schematic Supply Nets_4" [InNet('VMOT')] p4: isadvanced=TRUE voltage=0.000
SupplyNets "Schematic Supply Nets_3" [InNet('+5V')] p5: isadvanced=TRUE voltage=0.000
SupplyNets "Schematic Supply Nets_2" [InNet('GDRVP')] p6: isadvanced=TRUE voltage=0.000
SupplyNets "Schematic Supply Nets_1" [InNet('VBAT')] p7: isadvanced=TRUE voltage=0.000
SupplyNets "Schematic Supply Nets" [InNet('VMCUA')] p8: isadvanced=TRUE voltage=0.000
UnRoutedNet [All] p1: isadvanced=TRUE
UnpouredPolygon [All] p1: isadvanced=TRUE
ViasUnderSMD ViasUnderSMD_1 [All] p1: isadvanced=TRUE allowed=TRUE
Width MaxMinWidth_1 [All] p1: isadvanced=TRUE maxlimit=999 minlimit=4 preferedwidth=6 midlayer1_prefwidth=5.5 minimp=50.000000 maximp=50.000000 favimp=50.000000
Width "Schematic Width Constraint_2" [InNet('VDBG_C')] p2: maxlimit=999 minlimit=4 preferedwidth=8 minimp=50.000000 maximp=50.000000 favimp=50.000000
Width "Schematic Width Constraint_1" [InNetClass('CLS_PWR')] p3: maxlimit=999 minlimit=6 preferedwidth=8 minimp=50.000000 maximp=50.000000 favimp=50.000000
Width "Schematic Width Constraint" [InNetClass('CLS_GND')] p4: maxlimit=999 minlimit=6 preferedwidth=8 minimp=50.000000 maximp=50.000000 favimp=50.000000
Width [All] p5: maxlimit=999 minlimit=3.5 preferedwidth=6 minimp=50.000000 maximp=50.000000 favimp=50.000000
3 further rules are at their usual default settings.

## Classes and differential pairs
net class CLS_PWR: +3V3 +5V VBAT VDBG_C VIN VMCUA VMOT VREF+
net class CLS_GND: GDRVA GDRVP

## Components (designator, comment, footprint, x,y, rotation, side; value= is the part's Value field where it differs from the comment)
BAR1400 "BAR" BAR3X20T1 2249.54,1026.44 r90 bottom
BAR1401 "BAR" BAR3X18T1 1189.58,863.44 r0 bottom
BAR1402 "BAR" BAR3X8T1 2249.54,439.62 r270 bottom
BAR1403 "BAR" BAR3X10T1 1809.99,535.71 r180 bottom
BAR1404 "BAR" BAR3X8T1 1345.53,439.62 r90 bottom
BAR1405 "BAR" BAR3X10T1 1629.82,710.13 r180 bottom
BAR1406 "BAR" BAR3X6T1 1189.03,573.93 r90 bottom
BAR1407 "BAR" BAR3X20T1 1947.79,1044.77 r270 bottom
BAR1408 "BAR" BAR3X18T1 1794.52,341.19 r0 bottom
BAR1409 "BAR" BAR3X10T1 944.17,921.44 r90 top
C200 "C-NOMO" C0805 1133.99,1706.19 r0 top value=22uF
C201 "C-NOMO" C0805 1133.99,1778.08 r0 top value=22uF
C202 "C-NOMO" C0805 1338.02,1314.03 r270 top value=10uF
C203 "C-NOMO" C0805 1234.76,1279.97 r180 top value=10uF
C204 "C-NOMO" C0805 1234.73,1353.22 r180 top value=10uF
C205 "C-NOMO" C0603 1289.8,1415.95 r180 top value=100nF
C206 "C-NOMO" C0402 1155.44,1436.42 r0 top value=3.3nF
C207 "C-NOMO" C0402 1354.36,1191.15 r270 top value=100nF
C208 "C-NOMO" C0805 1339.79,864.45 r270 top value=10uF
C209 "C-NOMO" C0805 762.87,783.49 r0 top value=10uF
C210 "C-NOMO" C0805 777.84,1693.08 r0 top value=22uF
C211 "C-NOMO" C0805 777.84,1621.19 r0 top value=22uF
C212 "C-NOMO" C0402 1096.37,812.77 r90 top value=100nF
C213 "C-NOMO" C0805 908.52,1321.27 r90 top value=10uF
C214 "C-NOMO" C0603 1030.08,1470.58 r270 top value=100nF
C215 "C-NOMO" C0402 840.08,1350.63 r90 top value=3.3nF
C216 "C-NOMO" C0603 1443.9,929.77 r0 top value=100nF
C217 "C-NOMO" C0603 1562,626.67 r225 top value=100nF
C218 "C-NOMO" C0603 1659.82,529.57 r225 top value=100nF
C219 "C-NOMO" C0603 1832.93,430.36 r270 top value=100nF
C300 "C-NOMO" C0402 1733.97,3124.58 r270 bottom value=100nF
C301 "C-NOMO" C0402 1690.32,3092.77 r90 bottom value=100nF
C302 "C-NOMO" C0402 2143.74,3162.58 r270 bottom value=100nF
C303 "C-NOMO" C0402 2126.16,2993.29 r180 bottom value=100nF
C304 "C-NOMO" C0402 1806.77,2957.26 r0 bottom value=100nF
C305 "C-NOMO" C0402 1732.72,2973.48 r270 bottom value=100nF
C306 "C-NOMO" C0402 2016.38,2975.37 r270 bottom value=100nF
C307 "C-NOMO" C0402 2099.85,3213.04 r180 bottom value=100nF
C308 "C-NOMO" C0402 1784.52,3214.04 r180 bottom value=100nF
C309 "C-NOMO" C0402 1806.52,3175.69 r180 bottom value=100nF
C310 "C-NOMO" C0402 2028.31,3213.04 r0 bottom value=100nF
C311 "C-NOMO" C0402 2031.86,3131.19 r315 bottom value=100nF
C312 "C-NOMO" C0402 1859.3,3193.81 r270 bottom value=100nF
C313 "C-NOMO" C0402 2109.33,3162.58 r270 bottom value=100nF
C400 "C-NOMO" C0402 1083.98,2974.67 r180 bottom value=2.2uF
C401 "C-NOMO" C0402 1276.74,2843.72 r180 bottom value=2.2uF
C402 "C-NOMO" C0402 1083.78,3013.74 r180 bottom value=100nF
C403 "C-NOMO" C0402 1276.55,2880.19 r180 bottom value=100nF
C404 "C-NOMO" C0402 1141.39,2956.21 r270 bottom value=100nF
C405 "C-NOMO" C0402 1084.12,2935.59 r0 bottom value=100nF
C406 "C-NOMO" C0402 1238.21,3139.44 r270 bottom value=100nF
C407 "C-NOMO" C0402 1117.25,2900.66 r0 bottom value=100nF
C408 "C-NOMO" C0402 1158.59,3013.74 r0 bottom value=100nF
C409 "C-NOMO" C0402 1199.4,3139.44 r270 bottom value=100nF
C410 "C-NOMO" C0402 1160.59,3139.44 r270 bottom value=2.2uF
C500 "C-NOMO" C0402 1333.32,2151.79 r90 top value=100nF
C501 "C-NOMO" C0402 1046.4,2169.79 r0 top value=100nF
C700 "C-NOMO" C0402 2548.13,2103.81 r0 top value=100nF
C701 "C-NOMO" C0402 2496.86,2121.6 r270 top value=100nF
C702 "C-NOMO" C0402 2742.32,1971.92 r90 top value=100nF
C703 "C-NOMO" C0402 2649.18,2014.84 r90 top value=100nF
C704 "C-NOMO" C0402 2563.96,2248.68 r0 top value=100nF
C705 "C-NOMO" C0402 2636.78,2248.68 r0 top value=100nF
C706 "C-NOMO" C0402 2612.96,2014.01 r270 top value=100nF
C707 "C-NOMO" C0402 2631.84,1959.8 r0 top value=100nF
C708 "C-NOMO" C0402 2563.96,2286.16 r180 top value=100nF
C709 "C-NOMO" C0402 2636.78,2286.16 r0 top value=100nF
C710 "C-NOMO" C0402 2600.16,2562.61 r90 top value=100nF
C711 "C-NOMO" C0402 2636.61,2562.98 r270 top value=100nF
C712 "C-NOMO" C0402 2600.16,2637.34 r270 top value=100nF
C713 "C-NOMO" C0402 2636.61,2637.34 r90 top value=100nF
C714 "C-NOMO" C0402 2549.34,3053.93 r180 top value=100nF
C715 "C-NOMO" C0402 2625.68,3053.93 r180 top value=100nF
C716 "C-NOMO" C0402 2699.14,2790.98 r180 top value=100nF
C717 "C-NOMO" C0402 2699.14,2826.98 r0 top value=100nF
C718 "C-NOMO" C0402 2683.31,3065.04 r90 top value=100nF
C719 "C-NOMO" C0402 2720.85,3065.05 r270 top value=100nF
C720 "C-NOMO" C0402 2641.04,2808.25 r270 top value=100nF
C721 "C-NOMO" C0402 2641.04,2733.94 r270 top value=100nF
C800 "C-NOMO" C0402 995.25,1872.64 r90 top value=10pF
C801 "C-NOMO" C0402 2271.7,1758.79 r270 top value=10pF
C802 "C-NOMO" C0402 754.25,1854.76 r270 top value=100nF
C803 "C-NOMO" C0402 2525.86,1799.04 r180 top value=100nF
C804 "C-NOMO" C0402 815.12,524.74 r180 top value=10pF
C805 "C-NOMO" C0402 2315.17,3121.24 r270 top value=10pF
C806 "C-NOMO" C0402 676.37,613.19 r270 top value=100nF
C807 "C-NOMO" C0402 2551.82,3160.53 r90 top value=100nF
C900 "C-NOMO" C0603 1994.76,1276.17 r0 top value=2.2uF
C901 "C-NOMO" C0603 1605.81,1034.49 r0 top value=2.2uF
C902 "C-NOMO" C0402 1562.92,1395.3 r90 bottom value=1uF
C903 "C-NOMO" C0402 1642.91,1090.09 r0 top value=1uF
C904 "C-NOMO" C0603 1993.86,1188.81 r0 top value=2.2uF
C905 "C-NOMO" C0402 1563.86,1090.09 r0 top value=47nF
C906 "C-NOMO" C0603 2042.75,430.36 r270 top value=2.2uF
C907 "C-NOMO" C0402 1760.64,1395.3 r270 bottom value=1uF
C908 "C-NOMO" C0603 1475.14,1061.19 r270 top value=1uF
C909 "C-NOMO" C0402 1780.24,1156.1 r180 bottom value=1nF
C910 "C-NOMO" C0402 1799.26,1216.89 r270 bottom value=1nF
C911 "C-NOMO" C0402 1799.26,1313.69 r90 bottom value=1nF
C1000 "C-NOMO" C0402 2560.05,1959.8 r180 top value=100nF
C1001 "C-NOMO" C0402 2488.26,1959.8 r180 top value=100nF
C1200 "C-NOMO" C0603 2025.53,2445.3 r0 bottom value=4.7uF
C1201 "C-NOMO" C0402 2052.84,2490.47 r0 bottom value=100nF
C1202 "C-NOMO" C0402 2015.67,2386.55 r270 bottom value=100nF
C1203 "C-NOMO" C0402 2052.84,2521.3 r0 bottom value=100nF
C1204 "C-NOMO" C0402 2000.63,2571.96 r90 bottom value=100nF
C1205 "C-NOMO" C0402 2052.84,2554.13 r0 bottom value=100nF
C1206 "C-NOMO" C0402 2038.42,2706.13 r90 bottom value=100nF
C1207 "C-NOMO" C0402 1694.47,2205.82 r0 bottom value=100nF
C1208 "C-NOMO" C0402 1907.91,2386.55 r270 bottom value=100nF
C1209 "C-NOMO" C0402 1979.75,2386.55 r270 bottom value=100nF
C1210 "C-NOMO" C0402 1943.83,2386.55 r270 bottom value=100nF
C1211 "C-NOMO" C0402 2004.03,2640.28 r270 bottom value=100nF
C1212 "C-NOMO" C0402 2115.02,2430.56 r180 bottom value=100nF
C1213 "C-NOMO" C0402 2051.59,2386.55 r270 bottom value=100nF
C1214 "C-NOMO" C0402 2038.98,2640.28 r270 bottom value=100nF
C1215 "C-NOMO" C0402 2052.84,2586.96 r0 bottom value=100nF
C1216 "C-NOMO" C0402 1871.99,2386.55 r270 bottom value=100nF
C1217 "C-NOMO" C0402 1933.24,2571.96 r90 bottom value=100nF
C1218 "C-NOMO" C0402 1966.94,2571.96 r90 bottom value=100nF
C1219 "C-NOMO" C0402 1899.54,2571.96 r90 bottom value=100nF
C1220 "C-NOMO" C0402 1872.96,2519.11 r180 bottom value=100nF
C1221 "C-NOMO" C0402 1969.16,2640.26 r270 bottom value=100nF
C1222 "C-NOMO" C0402 2181.93,2526.18 r0 bottom value=2.2uF
C1223 "C-NOMO" C0402 1784.94,2769.87 r270 bottom value=2.2uF
C1224 "C-NOMO" C0402 2179.26,2590.38 r0 bottom value=100nF
C1225 "C-NOMO" C0402 1748.34,2769.87 r270 bottom value=100nF
C1226 "C-NOMO" C0402 1669.01,2378.38 r0 bottom value=100nF
C1227 "C-NOMO" C0603 1957.12,2716.94 r180 bottom value=1uF
C1228 "C-NOMO" C0402 1885.23,2696.37 r90 bottom value=100nF
C1229 "C-NOMO" C0402 1669.01,2416.23 r0 bottom value=2.2uF
C1230 "C-NOMO" C0603 2012.53,2130.42 r90 bottom value=1uF
C1231 "C-NOMO" C0402 1994.92,2213.62 r0 bottom value=100nF
C1232 "C-NOMO" C0805 2072.39,2128.56 r90 bottom value=10uF
C1233 "C-NOMO" C0402 2077.16,2214.62 r180 bottom value=100nF
C1300 "C-NOMO" C0402 1948.14,2137.6 r270 top value=100nF
C1301 "C-NOMO" C0402 1887.3,2440.31 r0 bottom value=100nF
C1302 "C-NOMO" C0402 1873.72,2478.76 r0 bottom value=100nF
C1303 "C-NOMO" C0402 1751.44,2152.88 r0 top value=100nF
C1304 "C-NOMO" C0402 1578.19,2152.88 r0 top value=100nF
C1305 "C-NOMO" C0402 1789.45,1668.5 r90 top value=100nF
D200 "SMAJ33CA" SMAJ33CA 1165.77,934.94 r180 top
D201 "SMAJ33CA" SMAJ33CA 654.22,1568.85 r270 top
D600 "PESD5V0H1BSF" PESD5V0H1BSF 628.59,2860.94 r270 top
D700 "PESD5V0H1BSF" PESD5V0H1BSF 2806.2,2139.49 r90 top
D701 "PESD5V0H1BSF" PESD5V0H1BSF 2794.31,2106.02 r180 top
D900 "SMF15CA" SMF15CA 2368.81,462.05 r90 bottom
D901 "SMF15CA" SMF15CA 2132.14,680.45 r270 bottom
D902 "SMF15CA" SMF15CA 2368.81,1120.26 r90 bottom
D903 "SMF15CA" SMF15CA 2132.14,899.85 r270 bottom
D904 "SMF15CA" SMF15CA 2368.81,1344.66 r90 bottom
D905 "SMF15CA" SMF15CA 2132.14,1558.07 r270 bottom
J200 "XT60PW-M" XT60PW-M 619.31,1113.39 r90 top locked
J600 "AFC01-S40FCA-00" AFC01-S40FCA-00 526.54,2528.52 r270 top locked
J700 "AFC01-S40FCA-00" AFC01-S40FCA-00 2948.09,2528.52 r90 top locked
J900 "LCC40PW-M" LCC40PW-M 3069.74,1154.5 r270 top locked
J1000 "MOLEX-532610571" MOLEX-532610571 2981.94,1154.5 r90 bottom locked
L200 "L" FXL0420 1294.28,1714.36 r90 top value=2.2uH
L201 "L" FXL0420 953.83,1674.22 r90 top value=2.2uH
L202 "BLM15PD121SN1D" L0402 2028.03,2120.04 r180 top value=120R@100MHz
MARKPOINT1400 "MARKPOINT" MARKPOINT-1.0#1 2992.53,2992.74 r90 bottom
MARKPOINT1401 "MARKPOINT" MARKPOINT-1.0#1 478.31,633.19 r90 bottom locked
MARKPOINT1402 "MARKPOINT" MARKPOINT-1.0#2 2725.52,346.04 r90 top
MARKPOINT1403 "MARKPOINT" MARKPOINT-1.0#2 746.5,3074.47 r90 top
POSHOLE1400 "POSHOLE" POSHOLE-3.2 2918.65,416.03 r90 top locked
POSHOLE1401 "POSHOLE" POSHOLE-3.2 556.44,416.03 r90 top locked
POSHOLE1402 "POSHOLE" POSHOLE-3.2 2918.65,3171.93 r90 top locked
POSHOLE1403 "POSHOLE" POSHOLE-3.2 556.21,3171.94 r90 top locked
POSHOLE1404 "POSHOLE" POSHOLE-3.2 2918.65,1876.58 r90 top locked
POSHOLE1405 "POSHOLE" POSHOLE-3.2 556.44,1876.58 r90 top locked
Q200 "CSD18534Q5A" CSD18534Q5A 1058.36,1260.5 r270 top
Q201 "IAUC100N04S6N022" IAUC100N04S6N022 1158.07,619.44 r0 top
Q700 "SK2301AAT" SK2301AAT 2755.33,2048.97 r0 top
Q900 "IAUC100N04S6N022" IAUC100N04S6N022 2243.26,462.04 r180 top
Q901 "IAUC100N04S6N022" IAUC100N04S6N022 2243.06,681.45 r0 top
Q902 "IAUC100N04S6N022" IAUC100N04S6N022 2243.26,1120.26 r180 top
Q903 "IAUC100N04S6N022" IAUC100N04S6N022 2243.06,900.86 r0 top
Q904 "IAUC100N04S6N022" IAUC100N04S6N022 2243.26,1344.66 r180 top
Q905 "IAUC100N04S6N022" IAUC100N04S6N022 2243.06,1559.07 r0 top
R200 "R" R0402 1166.53,1616.72 r180 top value=100K
R201 "R" R0603 1153.15,1482.11 r180 top value=562K
R202 "R" R1206 535.6,1561.96 r90 top value=0R
R203 "R" R0603 1153.15,1533.94 r0 top value=180K
R204 "R" R0402 796.65,1562.07 r180 top value=100K
R205 "R" R0603 781.63,1437.09 r180 top value=953K
R206 "R" R0603 781.63,1491.29 r0 top value=180K
R400 "R" R0402 1368.83,2665.31 r270 top value=47K
R401 "R" R0402 1333.04,2665.31 r90 top value=22R
R402 "R" R0402 1259.85,2646 r0 top value=47K
R403 "R" R0402 1259.85,2681.61 r180 top value=22R
R404 "R" R0402 1188.66,2646 r0 top value=47K
R405 "R" R0402 1188.66,2681.61 r180 top value=22R
R406 "R" R0402 1404.29,2806.26 r270 top value=47K
R407 "R" R0402 1368.5,2806.26 r90 top value=22R
R408 "R" R0402 1404.29,2736.62 r270 top value=47K
R409 "R" R0402 1368.5,2736.62 r90 top value=22R
R410 "R" R0402 1404.29,2875.89 r270 top value=47K
R411 "R" R0402 1368.5,2875.89 r90 top value=22R
R412 "R" R0402 1117.47,2646 r0 top value=47K
R413 "R" R0402 1117.47,2681.61 r180 top value=22R
R414 "R" R0402 1046.28,2646 r0 top value=47K
R415 "R" R0402 1046.28,2681.61 r180 top value=22R
R416 "R" R0402 1404.29,2948.53 r270 top value=10K
R417 "R" R0402 1368.5,2948.53 r90 top value=22R
R418 "R" R0402 1386.64,3072.53 r180 top value=22R
R419 "R" R0402 1179.67,2957.44 r90 bottom value=47K
R420 "R" R0402 1404.29,3019.62 r270 top value=47K
R421 "R" R0402 1368.5,3019.62 r90 top value=0R
R500 "R" R0402 1137.38,2517.13 r270 top value=10K
R501 "R" R0402 1183.48,2151.79 r90 top value=33R
R502 "R" R0402 1217.05,2151.79 r90 top value=33R
R503 "R" R0402 845.15,2490.62 r90 top value=33R
R504 "R" R0402 1137.38,2363.85 r90 top value=33R
R505 "R" R0402 845.15,2419.65 r90 top value=33R
R506 "R" R0402 1137.38,2441.74 r270 top value=33R
R507 "R" R0402 1124.58,2170.49 r180 top value=33R
R508 "R" R0402 1250.63,2151.79 r90 top value=33R
R600 "R" R0402 765.64,2163.91 r90 top value=1K
R601 "R" R0402 765.64,2092.3 r270 top value=100R
R602 "R" R0402 700.7,2077.88 r180 top value=100R
R700 "R" R0402 2683.83,2048.35 r90 top value=47K
R701 "R" R0402 2562.04,2067.05 r0 top value=33R
R702 "R" R0402 2342.77,2786.8 r0 top value=33R
R703 "R" R0402 2685.69,2105.18 r180 top value=33R
R704 "R" R0402 2616.52,2105.18 r180 top value=33R
R705 "R" R0402 2705.69,2143.3 r0 top value=33R
R706 "R" R0402 2631.13,2067.05 r180 top value=33R
R707 "R" R0402 2690.64,2203.92 r270 top value=33R
R708 "R" R0402 2690.64,2275.28 r270 top value=33R
R709 "R" R0402 2690.64,2346.64 r270 top value=33R
R710 "R" R0402 2690.64,2418 r270 top value=33R
R711 "R" R0402 2690.64,2489.36 r90 top value=33R
R712 "R" R0402 2625.53,2507.49 r180 top value=10K
R713 "R" R0402 2616.82,2860.23 r180 top value=33R
R714 "R" R0402 2549.01,2860.8 r180 top value=33R
R715 "R" R0402 2576.61,2695.78 r0 top value=33R
R800 "R" R0402 976.62,1927.69 r0 top value=10K
R801 "R" R0402 958.64,1872.34 r90 top value=1.5K
R802 "R" R0402 2525.54,1764.72 r0 top value=10K
R803 "R" R0402 2307.14,1758.79 r270 top value=1.5K
R804 "R" R0402 752.87,1926.4 r90 top value=9.1K
R805 "R" R0402 2578.91,1782.23 r270 top value=9.1K
R806 "R" R0402 1114.44,1597.83 r270 top value=6.2K
R807 "R" R0402 2288.12,1704.28 r0 top value=6.2K
R808 "R" R0402 742.87,564.37 r0 top value=10K
R809 "R" R0402 814.3,564.37 r180 top value=1.5K
R810 "R" R0402 2331.12,3180.7 r180 top value=10K
R811 "R" R0402 2351.19,3120.45 r270 top value=1.5K
R812 "R" R0402 674.99,690.92 r90 top value=9.1K
R813 "R" R0402 2476.06,3057.4 r0 top value=9.1K
R814 "R" R0402 1066.69,468.92 r0 top value=6.2K
R815 "R" R0402 2406.04,3057.4 r180 top value=6.2K
R900 "R" R0402 1705.91,1065.88 r270 top value=0R5
R901 "R" R0603 2435.51,460.05 r90 bottom value=100K
R902 "R" R0402 1462.7,1409.42 r0 top value=10K
R903 "R" R0402 1462.7,1376.49 r0 top value=10K
R904 "R" R0402 1467.49,1227.78 r0 top value=10K
R905 "R" R0402 1585.51,1486.98 r270 top value=10K
R906 "R" R0402 1759.77,1065.88 r270 top value=0R5
R907 "R" R0603 2065.55,661.45 r270 bottom value=100K
R908 "R" R0402 1674.13,1579.59 r270 top value=33R
R909 "R" R0402 1891.13,1244.81 r0 top value=0R5
R910 "R" R0603 2435.51,1118.26 r90 bottom value=100K
R911 "R" R0402 1544.84,1657.1 r270 top value=33R
R912 "R" R0402 1589.68,1657.1 r270 top value=33R
R913 "R" R0402 1634.52,1657.1 r270 top value=33R
R914 "R" R0402 1872.32,1130.68 r270 top value=0R5
R915 "R" R0603 2065.55,880.85 r270 bottom value=100K
R916 "R" R0402 1708.66,1579.22 r270 top value=33R
R917 "R" R0402 1822.84,1669.29 r270 top value=33R
R918 "R" R2512 1994.53,627.74 r90 top value=0R005
R919 "R" R0402 1857.61,1669.29 r270 top value=33R
R920 "R" R0402 1891.24,1277.2 r0 top value=0R5
R921 "R" R0603 1445.56,985.54 r180 top value=47K
R922 "R" R0603 2435.51,1346.16 r90 bottom value=100K
R923 "R" R0603 1355.07,997.89 r90 top value=6.8K
R924 "R" R0402 1859.92,1413.75 r90 top value=0R5
R925 "R" R0603 2065.55,1539.07 r270 bottom value=100K
R926 "R" R2512 1994.53,1006.62 r270 top value=0R005
R927 "R" R2512 1994.53,1470.5 r90 top value=0R005
R928 "R" R0603 1417.07,1062.18 r90 top value=1K
R1000 "R" R0402 2423.45,1892.72 r0 top value=33R
R1001 "R" R0402 2631.06,1922.86 r0 top value=33R
R1002 "R" R0402 2423.45,1860.11 r0 top value=33R
R1003 "R" R0402 2631.06,1887.3 r0 top value=33R
R1004 "R" R0402 2631.06,1816.06 r180 top value=33R
R1005 "R" R0402 2631.06,1851.74 r0 top value=33R
R1200 "R" R0603 2046.21,2161.32 r0 top value=0R
R1300 "R" R0402 1570.75,2611.6 r180 top value=33R
R1301 "R" R0402 2342.76,2583.31 r0 top value=33R
R1302 "R" R0402 1570.75,2860.81 r180 top value=33R
R1303 "R" R0402 1570.75,2642.75 r180 top value=33R
R1304 "R" R0402 2342.76,2615.44 r0 top value=33R
R1305 "R" R0402 1570.75,2798.51 r180 top value=33R
R1306 "R" R0402 1570.75,2829.66 r180 top value=33R
R1307 "R" R0402 1570.75,2705.06 r180 top value=33R
R1308 "R" R0402 1544.99,1727.58 r270 top value=33R
R1309 "R" R0402 1852.65,2839.26 r90 top value=33R
R1310 "R" R0402 1740.37,3072.42 r0 bottom value=33R
R1311 "R" R0402 1589.69,1727.58 r270 top value=33R
R1312 "R" R0402 1821.02,2839.26 r90 top value=33R
R1313 "R" R0402 1570.75,2335.11 r180 top value=33R
R1314 "R" R0402 1570.75,2270.87 r180 top value=33R
R1315 "R" R0402 1634.4,1727.58 r270 top value=33R
R1316 "R" R0402 1571.04,2399.35 r180 top value=33R
R1317 "R" R0402 2105.62,2839.26 r90 top value=33R
R1318 "R" R0402 1789.4,2839.26 r90 top value=33R
R1319 "R" R0402 1726.16,2839.26 r90 top value=33R
R1320 "R" R0402 2042.38,2839.26 r90 top value=33R
R1321 "R" R0402 1570.75,2517.08 r180 top value=33R
R1322 "R" R0402 1570.75,2206.64 r180 top value=33R
R1323 "R" R0402 1404.21,2664.94 r270 top value=33R
R1324 "R" R0402 2074,2839.26 r90 top value=33R
R1325 "R" R0402 1570.75,2238.76 r180 top value=33R
R1326 "R" R0402 1819.67,2769.36 r90 bottom value=33R
R1327 "R" R0402 1757.78,2839.26 r90 top value=33R
R1328 "R" R0402 1570.75,2767.36 r180 top value=33R
R1329 "R" R0402 2342.76,2743.94 r0 top value=33R
R1330 "R" R0402 1284.2,2151.79 r270 top value=33R
R1331 "R" R0402 2342.76,2711.82 r0 top value=33R
R1332 "R" R0402 1599.73,3099.42 r45 top value=33R
R1333 "R" R0402 1571.04,2367.23 r180 top value=33R
R1334 "R" R0402 2215.38,2106.58 r270 top value=33R
R1335 "R" R0402 1740.97,2890.49 r0 top value=33R
R1336 "R" R0402 2279.37,2106.58 r270 top value=33R
R1337 "R" R0402 1570.75,2302.99 r180 top value=33R
R1338 "R" R0402 2410.3,2022.77 r90 top value=33R
R1339 "R" R0402 1805.28,2209.19 r180 bottom value=33R
R1340 "R" R0402 1660.29,2273.69 r180 bottom value=33R
R1341 "R" R0402 2168.87,2839.26 r90 top value=33R
R1342 "R" R0402 1660.29,2242.35 r180 bottom value=33R
R1343 "R" R0402 2137.24,2839.26 r90 top value=33R
R1344 "R" R0402 1661.68,2315.73 r180 bottom value=33R
R1345 "R" R0402 1979.13,2839.26 r90 top value=33R
R1346 "R" R0402 2342.76,2679.69 r0 top value=33R
R1347 "R" R0402 1915.89,2839.26 r90 top value=33R
R1348 "R" R0402 2342.76,2647.56 r0 top value=33R
R1349 "R" R0402 1884.27,2839.26 r90 top value=33R
R1350 "R" R0402 2342.76,2486.93 r0 top value=33R
R1351 "R" R0402 1947.51,2839.26 r90 top value=33R
R1352 "R" R0402 2342.76,2519.06 r0 top value=33R
R1353 "R" R0402 2010.76,2839.26 r90 top value=33R
R1354 "R" R0402 2263.73,2838.95 r90 top value=33R
R1355 "R" R0402 1694.54,2839.26 r90 top value=33R
R1356 "R" R0402 2326.97,2838.95 r90 top value=33R
R1357 "R" R0402 1662.91,2839.26 r90 top value=33R
R1358 "R" R0402 2200.49,2839.26 r90 top value=33R
R1359 "R" R0402 1631.29,2839.26 r90 top value=33R
R1360 "R" R0402 2295.35,2838.95 r90 top value=33R
R1361 "R" R0402 2232.11,2839.26 r90 top value=33R
R1362 "R" R0402 2098.79,2123.04 r0 top value=33R
R1363 "R" R0402 1904.42,2038.83 r270 top value=33R
R1364 "R" R0402 2151.4,2106.58 r270 top value=33R
R1365 "R" R0402 1967.68,2038.83 r270 top value=33R
R1366 "R" R0402 1936.05,2038.83 r270 top value=33R
R1367 "R" R0402 2000.32,2038.83 r270 top value=33R
R1368 "R" R0402 2098.79,2090.3 r0 top value=33R
R1369 "R" R0402 2098.79,2055.25 r0 top value=33R
R1370 "R" R0402 1979.73,2136.81 r270 top value=33R
R1371 "R" R0402 2183.39,2106.58 r270 top value=33R
R1372 "R" R0402 1911.8,2138.39 r270 top value=10K
R1373 "R" R0402 2034.57,2038.89 r270 top value=33R
R1374 "R" R0402 2247.37,2106.58 r270 top value=33R
R1375 "R" R0402 2098.49,2020.19 r180 top value=33R
R1376 "R" R0402 1830.24,2151.5 r0 top value=51R
R1377 "R" R0402 1570.75,2673.9 r180 top value=33R
R1378 "R" R0402 2342.76,2551.18 r0 top value=33R
R1379 "R" R0402 2342.76,2390.55 r0 top value=33R
R1380 "R" R0402 2342.76,2358.42 r0 top value=33R
R1381 "R" R0402 1661.16,2151.5 r180 top value=51R
R1382 "R" R0402 2342.76,2422.67 r0 top value=33R
R1383 "R" R0402 1838.05,2410.88 r270 bottom value=10K
R1384 "R" R0402 2342.76,2454.8 r0 top value=33R
R1385 "R" R0402 1807.1,2449.8 r90 bottom value=10K
R1386 "R" R0402 1731.78,2097.43 r270 top value=10K
R1387 "R" R0402 1559.44,2097.08 r270 top value=10K
RT800 "NCP15XH103F03RC" NTC0402 1167.55,1580.02 r0 top value="10K 3380"
RT801 "NCP15XH103F03RC" NTC0402 2262.75,1559.07 r180 bottom value="10K 3380"
RT802 "NCP15XH103F03RC" NTC0402 1067.23,436.11 r180 top value="10K 3380"
RT803 "NCP15XH103F03RC" NTC0402 2077.14,3068 r180 bottom value="10K 3380"
TP1300 "TP" TP 2649.71,1776.15 r90 top
TP1301 "TP" TP 876.87,480 r90 top
TP1302 "TP" TP 2551.82,3099.42 r90 top
U200 "TPS62130RGTR" TPS62130RGTR 1286.35,1526.32 r270 top
U201 "LM74700QDBVR-Q1" LM74700QDBVR-Q1 1249.1,1172.41 r180 top
U202 "TPS62130RGTR" TPS62130RGTR 919.18,1489.11 r270 top
U203 "LM74700QDBVR-Q1" LM74700QDBVR-Q1 1205.09,808.38 r0 top
U300 "IS42S32800J-6BLI" IS42S32800J-6BLI 1937.38,3068.2 r90 top locked
U400 "KLMAG2GEND-B031" KLMAG2GEND-B031 1110.35,2969.77 r180 top locked
U500 "MX25L25645GZ2I-08G" MX25L25645GZ2I-08G 991.1,2382.34 r270 top
U501 "MX25L25645GZ2I-08G" MX25L25645GZ2I-08G 1284.36,2382.34 r270 top
U600 "TPESD8004MUTAG" TPESD8004MUTAG 700.55,2933.73 r180 top
U601 "TPESD8004MUTAG" TPESD8004MUTAG 700.55,2823.73 r0 top
U602 "TPESD8004MUTAG" TPESD8004MUTAG 700.55,2713.73 r0 top
U603 "TPESD8004MUTAG" TPESD8004MUTAG 700.55,2603.73 r0 top
U604 "TPESD8004MUTAG" TPESD8004MUTAG 700.55,2493.73 r0 top
U605 "TPESD8004MUTAG" TPESD8004MUTAG 700.55,2383.73 r0 top
U606 "TPESD8004MUTAG" TPESD8004MUTAG 700.55,2273.73 r0 top
U607 "TPESD8004MUTAG" TPESD8004MUTAG 700.55,2163.73 r0 top
U700 "SN74AXC2T245RSWR" SN74AXC2T245RSWR 2476.95,2032.62 r90 top
U701 "SN74LVC1G14DRYR" SN74LVC1G14DRYR 2694.65,1973.44 r0 top
U702 "TXB0101DCKR" TXB0101DCKR 2594.67,2174.38 r0 top
U703 "SN74AXC1T45DEAR" SN74AXC1T45DEAR 2563.16,2014.11 r180 top
U704 "TXV0106BQBR" TXV0106BQBR 2599.28,2398.25 r180 top
U705 "74LVC2G17GM,115" 74LVC2G17GM,115 2555.6,2529.18 r180 top
U706 "74LVC2G17GM,115" 74LVC2G17GM,115 2681.63,2562.59 r0 top
U707 "SN74AXC4T774RSVR" SN74AXC4T774RSVR 2567.57,2953.63 r0 top
U708 "74LVC2G17GM,115" 74LVC2G17GM,115 2555.44,2626.79 r180 top
U709 "74LVC2G17GM,115" 74LVC2G17GM,115 2681.63,2637.12 r0 top
U710 "TPESD8004MUTAG" TPESD8004MUTAG 2791.6,2213.98 r180 top
U711 "TPESD8004MUTAG" TPESD8004MUTAG 2791.6,2323.36 r180 top
U712 "TXS0102DQER" TXS0102DQER 2704.32,2734.17 r0 top
U713 "SN74AXC4T774RSVR" SN74AXC4T774RSVR 2687.87,2953.63 r0 top
U714 "SN74AVC4T245RSVR" SN74AVC4T245RSVR 2572.5,2773.68 r180 top
U715 "TPESD8004MUTAG" TPESD8004MUTAG 2791.6,2432.74 r180 top
U716 "TPESD8004MUTAG" TPESD8004MUTAG 2791.6,2542.12 r180 top
U717 "TPESD8004MUTAG" TPESD8004MUTAG 2791.6,2651.5 r180 top
U718 "TPESD8004MUTAG" TPESD8004MUTAG 2791.6,2760.88 r180 top
U719 "TPESD8004MUTAG" TPESD8004MUTAG 2791.6,2869.26 r180 top
U720 "TPESD8004MUTAG" TPESD8004MUTAG 2791.6,2980.64 r180 top
U800 "TLV9061IDBVR" TLV9061IDBVR 857.67,1891 r180 top
U801 "TLV9061IDBVR" TLV9061IDBVR 2406.93,1741.88 r0 top
U802 "TLV9061IDBVR" TLV9061IDBVR 780.09,655.68 r180 top
U803 "TLV9061IDBVR" TLV9061IDBVR 2449.75,3141.36 r0 top
U900 "DRV8323RSRGZR" DRV8323RSRGZR 1671.97,1285.04 r90 top
U901 "TPESD8004MUTAG" TPESD8004MUTAG 1782.99,1579.91 r270 top
U902 "TPESD8004MUTAG" TPESD8004MUTAG 1731.51,1482.87 r270 top
U903 "TPESD8004MUTAG" TPESD8004MUTAG 1598.68,1579.43 r270 top
U904 "TPESD8004MUTAG" TPESD8004MUTAG 1508.19,1486.3 r270 top
U905 "TPESD8004MUTAG" TPESD8004MUTAG 1468.68,1299.53 r0 top
U906 "TPESD8004MUTAG" TPESD8004MUTAG 1446.17,1155.92 r90 top
U1000 "SN74AVC4T245RSVR" SN74AVC4T245RSVR 2525.9,1881.44 r270 top
U1001 "TPESD8004MUTAG" TPESD8004MUTAG 2703.11,1879.67 r0 top
U1200 "STM32H750XBH6" STM32H750XBH6 1957.06,2479.82 r90 top locked
U1301 "SN74LVC1G08DCKR" SN74LVC1G08DCKR 1709.14,1690.41 r270 top
Y1300 "OT252025MJBA4SL" OT252025MJBA4SL 1805.9,2083.41 r0 top value=25MHz
Y1301 "OK252032768KJBA4SL" OK252032768KJBA4SL 1636.54,2083.41 r0 top value=32.768KHz

## Footprints (in the part's own frame and the unit in brackets; to place one, negate y for a bottom-side part, rotate by r counter-clockwise, add the part's x,y. Pads: shape width x height; smd on the part's side, far side on the other; paste and mask are expansions set on the pad)
74LVC2G17GM,115 [mm] "PSON, 6-Leads, Body 1.45x1.00mm, Pitch 0.60mm, IPC Medium Density"
  rrect50% 0.4x0.25 smd: 1(-0.275,0.6)
  rrect50% 0.35x0.25 smd: 2(-0.3,0) 3(-0.3,-0.6) 4(0.3,-0.6) 5(0.3,0) 6(0.3,0.6)
  silkscreen extent -0.43,0.99 -0.12,0.99, body extent -0.53,-0.75 0.53,0.75, height 0.5
AFC01-S40FCA-00 [mm]
  rect 0.3x1.3 smd: 1(-9.75,1.34) 2(-9.25,1.34) 3(-8.75,1.34) 4(-8.25,1.34) 5(-7.75,1.34) 6(-7.25,1.34) 7(-6.75,1.34) 8(-6.25,1.34) 9(-5.75,1.34) 10(-5.25,1.34) 11(-4.75,1.34) 12(-4.25,1.34) 13(-3.75,1.34) 14(-3.25,1.34) 15(-2.75,1.34) 16(-2.25,1.34) 17(-1.75,1.34) 18(-1.25,1.34) 19(-0.75,1.34) 20(-0.25,1.34) 21(0.25,1.34) 22(0.75,1.34) 23(1.25,1.34) 24(1.75,1.34) 25(2.25,1.34) 26(2.75,1.34) 27(3.25,1.34) 28(3.75,1.34) 29(4.25,1.34) 30(4.75,1.34) 31(5.25,1.34) 32(5.75,1.34) 33(6.25,1.34) 34(6.75,1.34) 35(7.25,1.34) 36(7.75,1.34) 37(8.25,1.34) 38(8.75,1.34) 39(9.25,1.34) 40(9.75,1.34)
  rect 2x1.6 smd: ""(-11.463,-1.34) ""(11.463,-1.34)
  silkscreen extent -10,-0.02 -9.5,0.49, body extent -12.15,-4.32 12.15,1.53, height 2.11
BAR3X6T1 [mm]
  rrect10% 6.2x3.2 smd paste-2539.97: 1(0,0)
  body extent -3,-1.5 3,1.5, height 1
BAR3X8T1 [mm]
  rrect10% 8.2x3.2 smd paste-2539.97: 1(0,0)
  body extent -4,-1.5 4,1.5, height 1
BAR3X10T1 [mm]
  rrect10% 10.2x3.2 smd paste-2539.97: 1(0,0)
  body extent -5,-1.5 5,1.5, height 1
BAR3X18T1 [mm]
  rrect10% 18.2x3.2 smd paste-2539.97: 1(0,0)
  body extent -9,-1.5 9,1.5, height 1
BAR3X20T1 [mm]
  rrect10% 20.2x3.2 smd paste-2539.97: 1(0,0)
  body extent -10,-1.5 10,1.5, height 1
C0402 [mm] "Chip Capacitor, 2-Leads, Body 1.00x0.50mm, IPC Medium Density"
  rect 0.58x0.62 smd: 1(-0.48,0) 2(0.48,0)
  body extent -0.53,-0.28 0.53,0.28, height 0.55
C0603 [mm] "Chip Capacitor, 2-Leads, Body 1.60x0.80mm, IPC Medium Density"
  rect 0.8x0.95 smd: 1(-0.825,0) 2(0.825,0)
  body extent -0.85,-0.45 0.85,0.45, height 0.9
C0805 [mm] "Chip Capacitor, 2-Leads, Body 2.00x1.25mm, IPC Medium Density"
  rect 1.05x1.45 smd: 1(-0.925,0) 2(0.925,0)
  body extent -1.1,-0.72 1.1,0.72, height 1.45
CSD18534Q5A [mm]
  rect 0.75x0.65 smd paste-2539.97: 1(2.777,-1.93) 2(2.777,-0.643) 3(2.777,0.643) 4(2.777,1.93)
  rect 0.655x0.65 smd paste-2539.97: 5(-2.777,1.93) 6(-2.777,0.643) 7(-2.777,-0.643) 8(-2.777,-1.93)
  rect 4.295x4.51 smd paste-2539.97: 5(-0.314,0)
  body extent -3,-2.55 3,2.55, height 1.05
DRV8323RSRGZR [mm] "PQFN, 48-Leads, Body 7.00x7.00mm, Pitch 0.50mm, Thermal Pad 5.15x5.15mm, IPC Medium Density"
  rrect50% 0.55x0.35 smd: 1(-3.275,2.75) 2(-3.275,2.25) 3(-3.275,1.75) 4(-3.275,1.25) 5(-3.275,0.75) 6(-3.275,0.25) 7(-3.275,-0.25) 8(-3.275,-0.75) 9(-3.275,-1.25) 10(-3.275,-1.75) 11(-3.275,-2.25) 12(-3.275,-2.75) 25(3.275,-2.75) 26(3.275,-2.25) 27(3.275,-1.75) 28(3.275,-1.25) 29(3.275,-0.75) 30(3.275,-0.25) 31(3.275,0.25) 32(3.275,0.75) 33(3.275,1.25) 34(3.275,1.75) 35(3.275,2.25) 36(3.275,2.75)
  rrect50% 0.35x0.55 smd: 13(-2.75,-3.275) 14(-2.25,-3.275) 15(-1.75,-3.275) 16(-1.25,-3.275) 17(-0.75,-3.275) 18(-0.25,-3.275) 19(0.25,-3.275) 20(0.75,-3.275) 21(1.25,-3.275) 22(1.75,-3.275) 23(2.25,-3.275) 24(2.75,-3.275) 37(2.75,3.275) 38(2.25,3.275) 39(1.75,3.275) 40(1.25,3.275) 41(0.75,3.275) 42(0.25,3.275) 43(-0.25,3.275) 44(-0.75,3.275) 45(-1.25,3.275) 46(-1.75,3.275) 47(-2.25,3.275) 48(-2.75,3.275)
  rrect5% 5.15x5.15 smd paste-2539.97: 49(0,0)
  silkscreen extent -3.55,-3.55 3.55,3.55, body extent -3.55,-3.55 3.55,3.55, height 1
FXL0420 [mm]
  rrect10% 1.5x2.5 smd: 1(-1.85,0) 2(1.85,0)
  body extent -2.29,-2.11 2.27,2.09, height 1.85
IAUC100N04S6N022 [mm]
  rect 1.55x0.6 smd paste-1.55 mask+0: 1(-2.995,1.905) 1(-2.995,1.905) 1(-2.995,1.905) 2(-2.995,0.635) 2(-2.995,0.635) 2(-2.995,0.635) 3(-2.995,-0.635) 3(-2.995,-0.635) 3(-2.995,-0.635) 4(-2.995,-1.905) 4(-2.995,-1.905) 4(-2.995,-1.905)
  rect 1.55x0.6 smd paste-1.35 mask+0: 5(3.1,-1.905) 5(3.1,-1.905) 5(3.1,-1.905) 6(3.1,-0.635) 6(3.1,-0.635) 6(3.1,-0.635) 7(3.1,0.635) 7(3.1,0.635) 7(3.1,0.635) 8(3.1,1.905) 8(3.1,1.905) 8(3.1,1.905)
  SIG1 region: 3.775,2.205 3.775,-2.205 -1.125,-2.205 -1.125,2.205
  SIG1 region: -2.22,2.205 -2.22,-0.935 -3.77,-0.935 -3.77,2.205 -2.995,2.205
  silkscreen extent -2.02,1.65 -1.51,2.16, body extent -3.22,-2.71 3.22,2.7, height 1.01